# EAGLE board Pi_Block-Panel-v10 (EAGLE 6.6.0), part 1 of 3
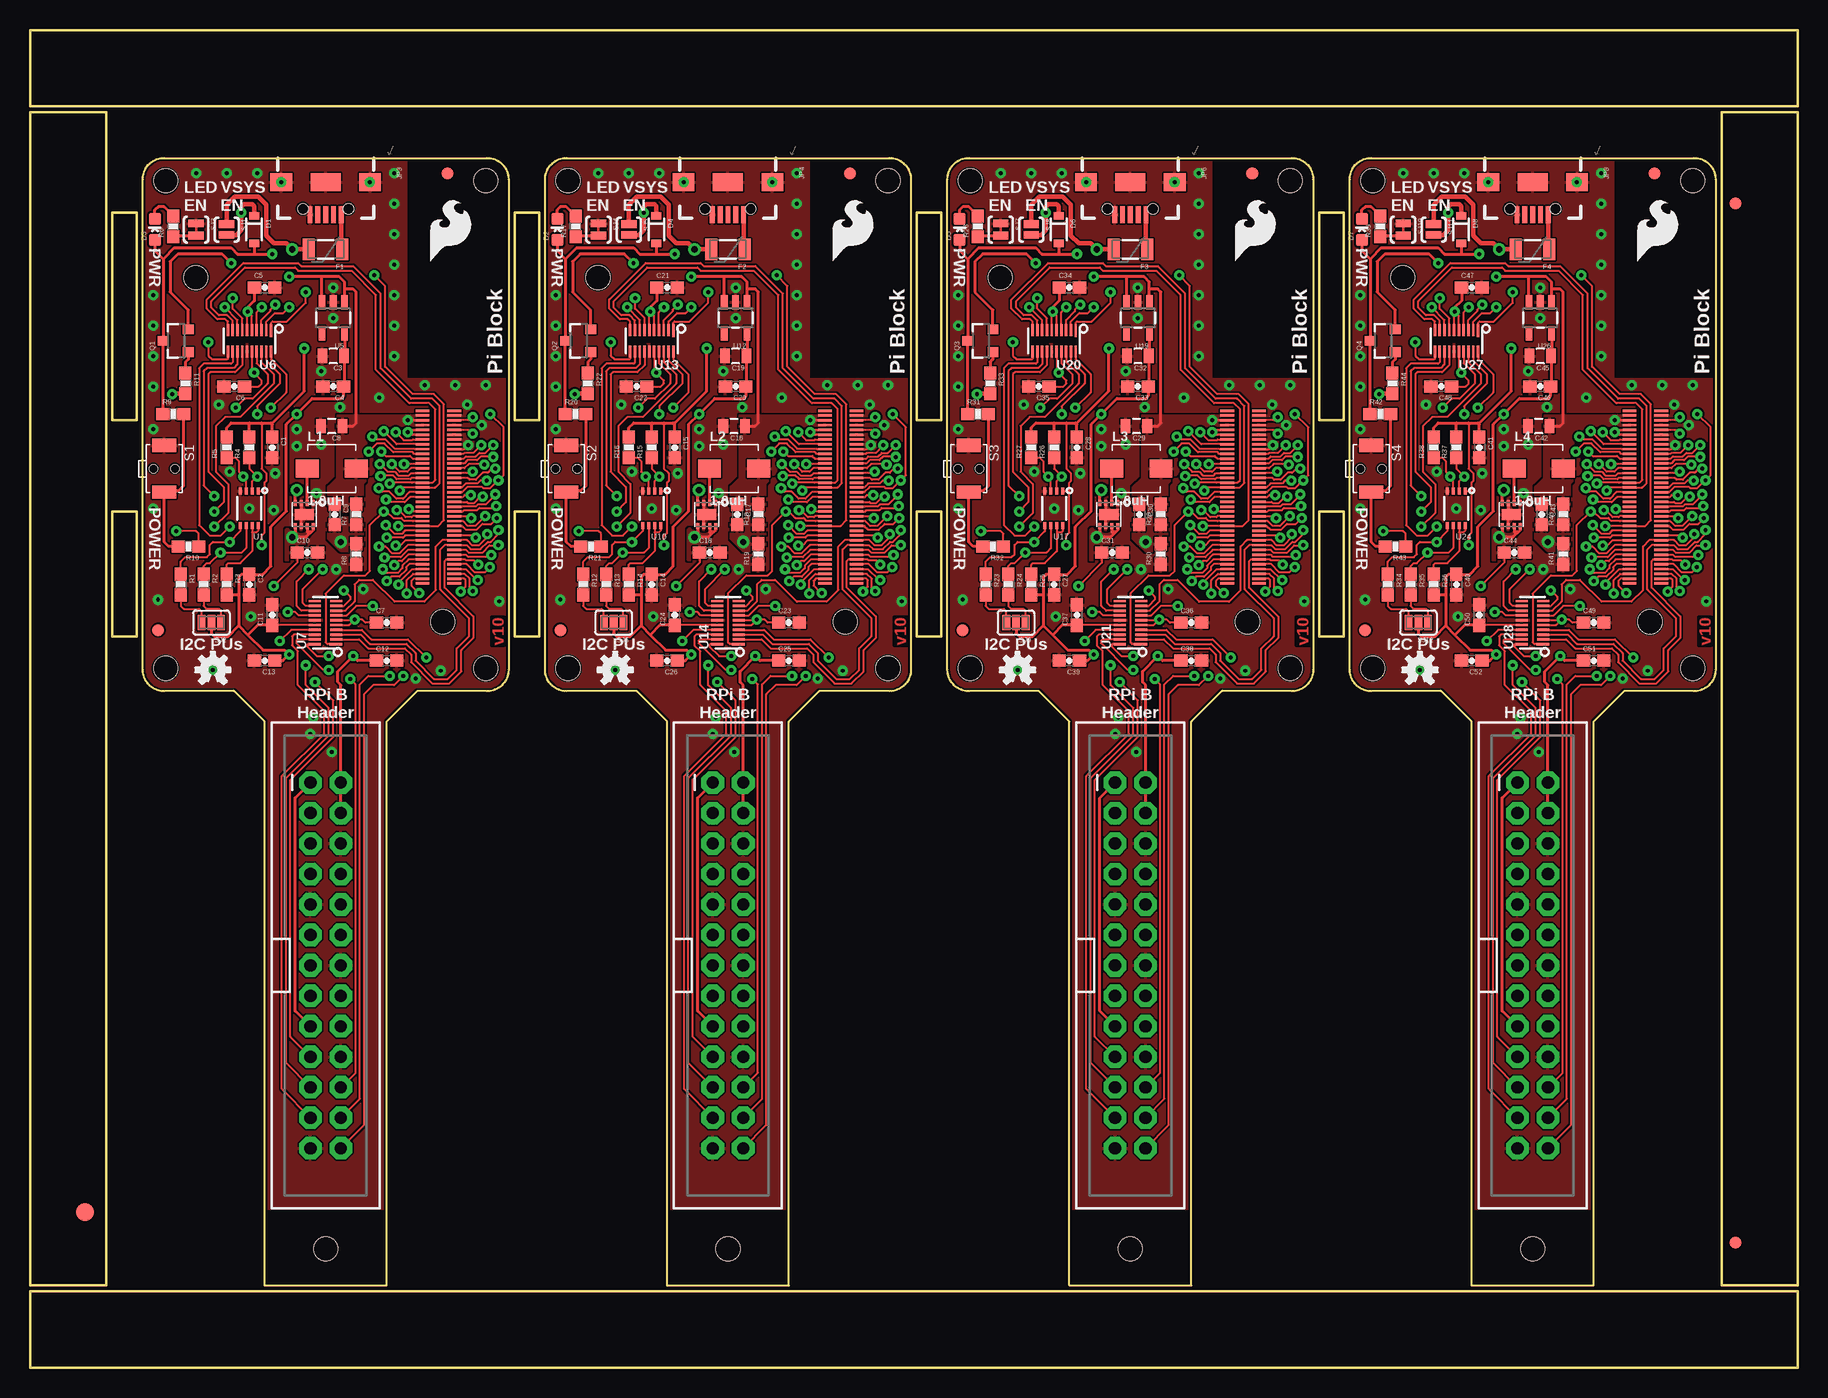
[diagram p0: board, top side]
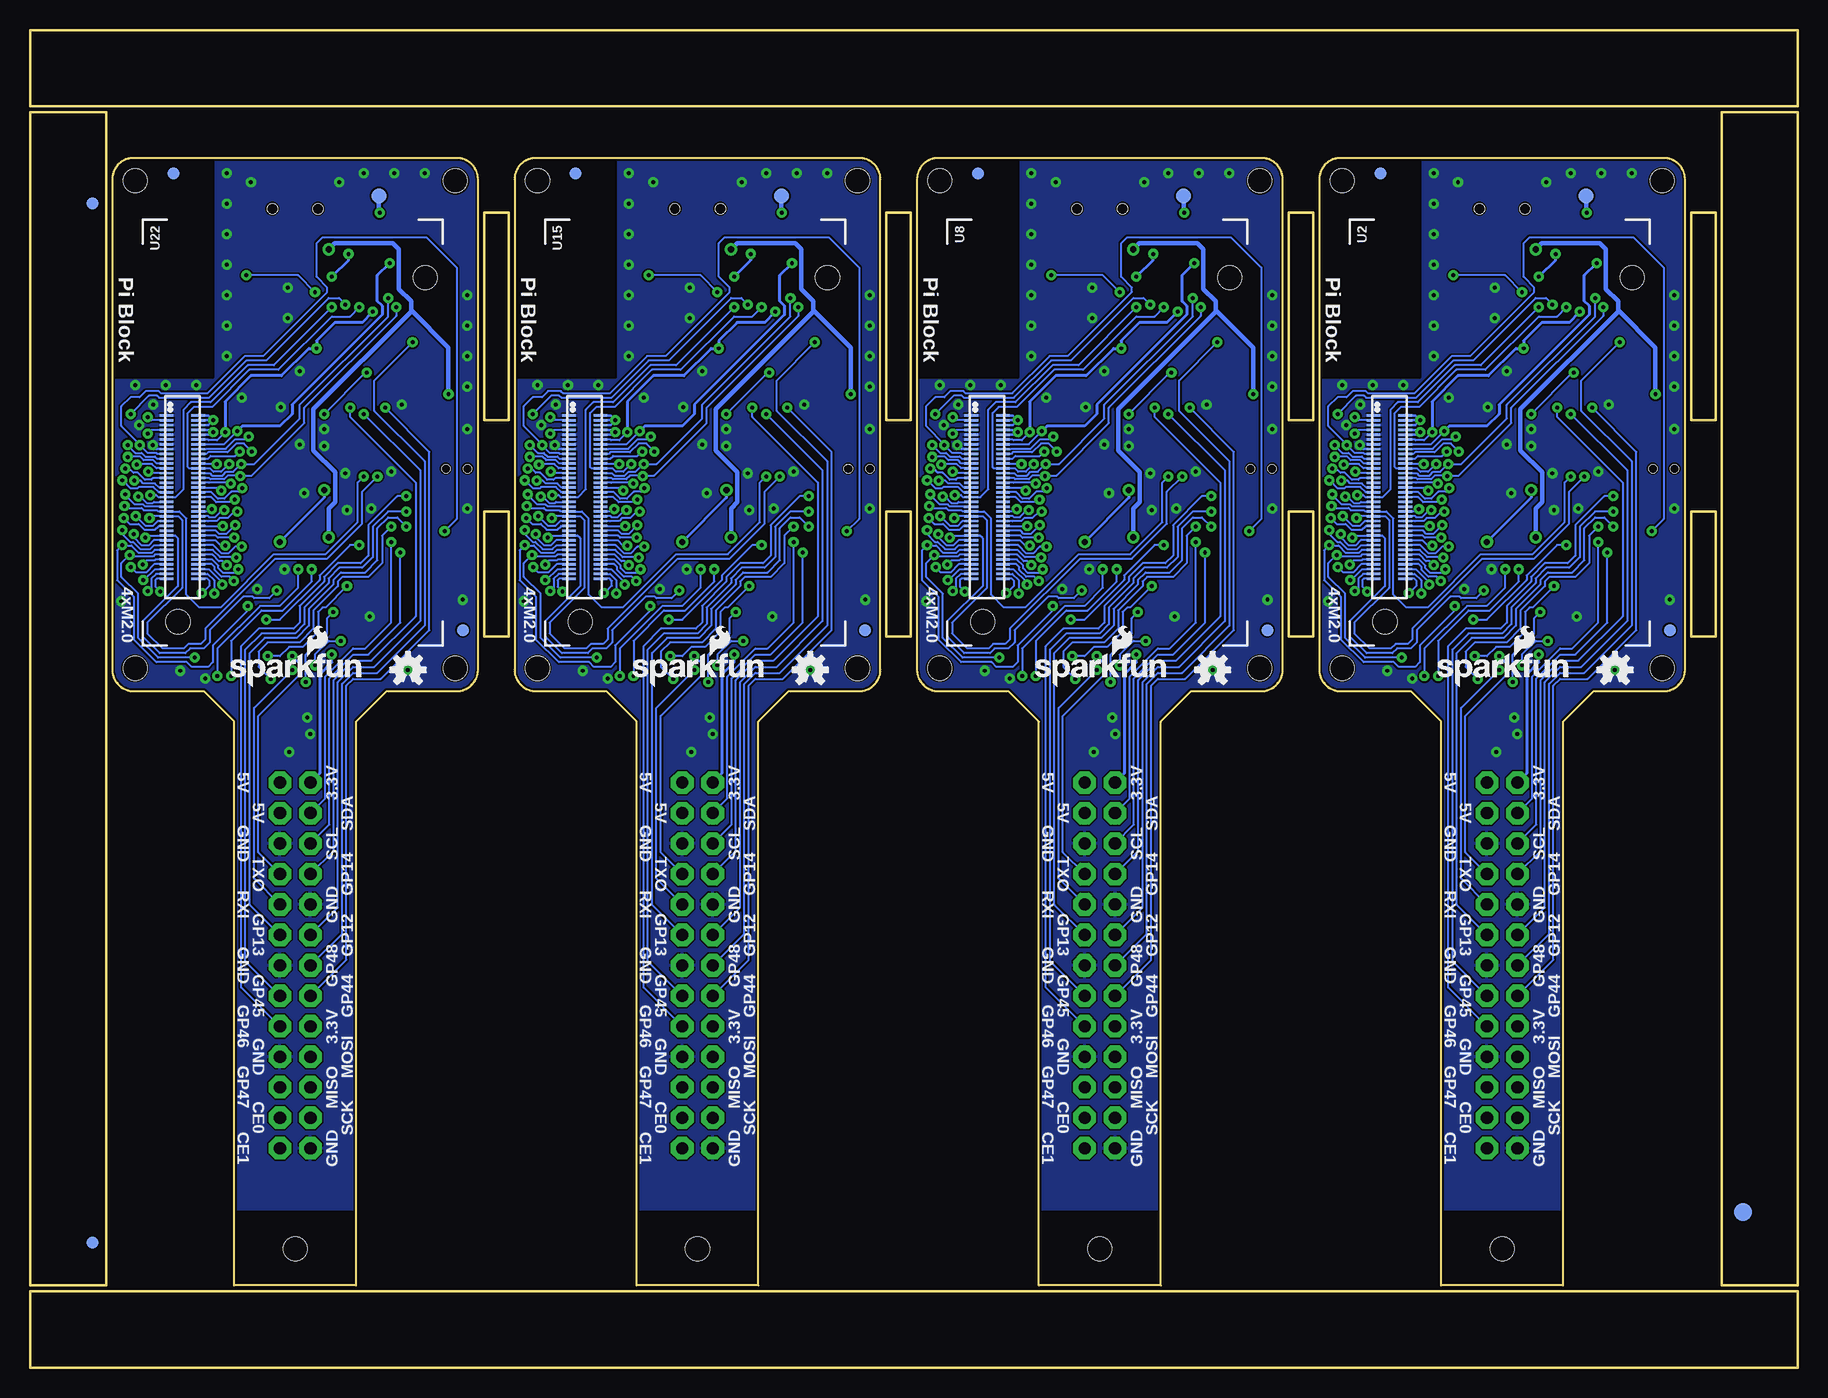
[diagram p1: board, bottom side, seen from below]

Size 147.32 x 111.51 mm. Coordinates in mm from the lower left corner, seen from the top.
Outline: 6.35,82.3 6.35,6.86 0,6.86 0,32.77
Outline: 0,28.45 0,104.65 6.35,104.65 6.35,77.98
Outline: 39.88,99.06 39.88,58.17 arc-90 38.1,56.39 32.26,56.39 29.72,53.85 29.72,6.86 19.56,6.86 19.56,53.85 17.02,56.39 11.18,56.39 arc-90 9.4,58.17 9.4,99.06 arc-90 11.18,100.84 38.1,100.84 arc-90 39.88,99.06
Outline: 73.41,99.06 73.41,58.17 arc-90 71.63,56.39 65.79,56.39 63.25,53.85 63.25,6.86 53.09,6.86 53.09,53.85 50.55,56.39 44.7,56.39 arc-90 42.93,58.17 42.93,99.06 arc-90 44.7,100.84 71.63,100.84 arc-90 73.41,99.06
Outline: 106.93,99.06 106.93,58.17 arc-90 105.16,56.39 99.31,56.39 96.77,53.85 96.77,6.86 86.61,6.86 86.61,53.85 84.07,56.39 78.23,56.39 arc-90 76.45,58.17 76.45,99.06 arc-90 78.23,100.84 105.16,100.84 arc-90 106.93,99.06
Outline: 140.46,99.06 140.46,58.17 arc-90 138.68,56.39 132.84,56.39 130.3,53.85 130.3,6.86 120.14,6.86 120.14,53.85 117.6,56.39 111.76,56.39 arc-90 109.98,58.17 109.98,99.06 arc-90 111.76,100.84 138.68,100.84 arc-90 140.46,99.06
Outline: 0,0 147.32,0 147.32,6.35 0,6.35 0,0
Outline: 140.97,104.65 140.97,6.86 147.32,6.86 147.32,104.65 140.97,104.65
Outline: 147.32,111.51 0,111.51 0,105.16 147.32,105.16 147.32,111.51
Outline: 8.89,96.27 6.86,96.27 6.86,78.99 8.89,78.99 8.89,96.27
Outline: 42.42,96.27 40.39,96.27 40.39,78.99 42.42,78.99 42.42,96.27
Outline: 75.95,96.27 73.91,96.27 73.91,78.99 75.95,78.99 75.95,96.27
Outline: 109.47,96.27 107.44,96.27 107.44,78.99 109.47,78.99 109.47,96.27
Outline: 6.86,60.96 8.89,60.96 8.89,71.37 6.86,71.37 6.86,60.96
Outline: 40.39,60.96 42.42,60.96 42.42,71.37 40.39,71.37 40.39,60.96
Outline: 73.91,60.96 75.95,60.96 75.95,71.37 73.91,71.37 73.91,60.96
Outline: 107.44,60.96 109.47,60.96 109.47,71.37 107.44,71.37 107.44,60.96
Copper layers (1*16): Top 0.035mm / dielectric 1.5mm / Bottom 0.035mm
Design rules "Pi_Block *": minimum track width 6mil, minimum drill 13mil, track to track 6mil, track to pad 6mil, pad to pad 6mil, via to via 6mil, smd to smd 6mil, copper to edge 6mil, drill to drill 6mil, minimum pad ring 12mil, minimum via ring 10mil, stop-mask expansion 4mil, vias tented up to drill 20mil, thermal gap 6mil
Holes 2 mm at 37.97,58.29 11.3,58.29 11.3,98.93 37.97,98.93 24.64,9.91 71.5,58.29 44.83,58.29 44.83,98.93 71.5,98.93 58.17,9.91 105.03,58.29 78.36,58.29 78.36,98.93 105.03,98.93 91.69,9.91 138.56,58.29 111.89,58.29 111.89,98.93 138.56,98.93 125.22,9.91
tRestrict: area 31.5,82.5 to 39.9,100.8; area 65,82.5 to 73.4,100.8; area 98.6,82.5 to 106.9,100.8; area 132.1,82.5 to 140.5,100.8; 52 lines
bRestrict: area 31.5,82.5 to 39.9,100.8; area 65,82.5 to 73.4,100.8; area 98.6,82.5 to 106.9,100.8; area 132.1,82.5 to 140.5,100.8; 12 lines

## Footprints (pad centres in the part's own frame; a part is rotated, then mirrored left to right if it is on the bottom)
0603-CAP = smd 1.1 x 1: 1 -0.85,0; 2 0.85,0
0805 = smd 0.8 x 1.2: 1 -0.9,0; 2 0.9,0
SOD-323 = smd 0.63 x 0.83: A 1.15,0; C -1.15,0
LED-0603 = smd 1 x 1: A 0,-0.877; C 0,0.877
FIDUCIAL-1.5X3 = smd 1.5 x 1.5: 1 0,0
FIDUCIAL-1X2 = smd 1 x 1: 1 0,0
PTC-1206 = smd 1 x 1.8: 1 -1.4,0; 2 1.4,0
2X13-SHROUDED = drill 1.016 pad 1.88 octagon: 1 -1.27,15.24; 2 1.27,15.24; 3 -1.27,12.7; 4 1.27,12.7; 5 -1.27,10.16; 6 1.27,10.16; 7 -1.27,7.62; 8 1.27,7.62; 9 -1.27,5.08; 10 1.27,5.08; 11 -1.27,2.54; 12 1.27,2.54; 13 -1.27,0; 14 1.27,0; 15 -1.27,-2.54; 16 1.27,-2.54; 17 -1.27,-5.08; 18 1.27,-5.08; 19 -1.27,-7.62; 20 1.27,-7.62; 21 -1.27,-10.16; 22 1.27,-10.16; 23 -1.27,-12.7; 24 1.27,-12.7; 25 -1.27,-15.24; 26 1.27,-15.24
USB-B-MICRO-SMD_V03 = smd 1.4 x 0.4: D+1 2.7,0; D-1 2.7,0.65; GND1 2.7,-1.3; ID1 2.7,-0.65; VBUS1 2.7,1.3 | smd 1.5 x 1.8: SHIELD1 0,3.7; SHIELD2 0,-3.7 | smd 1.5 x 2.5: SHIELD3 0,0 | hole 0.85: 2.2,1.9; 2.2,-1.9
INDUCTOR-SRP4020 = smd 1.9 x 1.5: P$1 -2.05,0; P$2 2.05,0
SOT23-3 = smd 0.8 x 0.9: 1 -0.95,-1; 2 0.95,-1; 3 0,1.1
0603-RES = smd 1.1 x 1: 1 -0.85,0; 2 0.85,0
TACTILE_SWITCH-SMD-RIGHT-ANGLE = smd 1.1 x 2: 1 -1.95,0; 2 1.95,0 | hole 0.7: 0,0.9; 0,-0.9
PAD-JUMPER-2-NO_YES_SILK = smd 0.635 x 1.27: 1 -0.45,0; 2 0.45,0
PAD-JUMPER-3-NC_BY_PASTE_YES_SILK_FULL_BOX = smd 0.635 x 1.27: 1 -0.813,0; 2 0,0; 3 0.813,0
PAD-JUMPER-2-NC_BY_TRACE_YES_SILK = smd 0.635 x 1.27: 1 -0.508,0; 2 0.508,0
PAD.03X.05 = smd 1.27 x 1.27: P$1 0,0
PCA9306DC-1:1 = smd 0.25 x 0.602: 1 -0.73,-1.446; 2 -0.23,-1.446; 3 0.27,-1.446; 4 0.77,-1.446; 5 0.77,1.431; 6 0.27,1.431; 7 -0.23,1.431; 8 -0.73,1.431
EDISON_DAUGHTER = smd 1.14 x 0.2: 1 1.98,19.17; 2 4.62,19.17; 3 1.98,18.77; 4 4.62,18.77; 5 1.98,18.37; 6 4.62,18.37; 7 1.98,17.97; 8 4.62,17.97; 9 1.98,17.57; 10 4.62,17.57; 11 1.98,17.17; 12 4.62,17.17; 13 1.98,16.77; 14 4.62,16.77; 15 1.98,16.37; 16 4.62,16.37; 17 1.98,15.97; 18 4.62,15.97; 19 1.98,15.57; 20 4.62,15.57; 21 1.98,15.17; 22 4.62,15.17; 23 1.98,14.77; 24 4.62,14.77; 25 1.98,14.37; 26 4.62,14.37; 27 1.98,13.97; 28 4.62,13.97; 29 1.98,13.57; 30 4.62,13.57; 31 1.98,13.17; 32 4.62,13.17; 33 1.98,12.77; 34 4.62,12.77; 35 1.98,12.37; 36 4.62,12.37; 37 1.98,11.97; 38 4.62,11.97; 39 1.98,11.57; 40 4.62,11.57; 41 1.98,11.17; 42 4.62,11.17; 43 1.98,10.77; 44 4.62,10.77; 45 1.98,10.37; 46 4.62,10.37; 47 1.98,9.97; 48 4.62,9.97; 49 1.98,9.57; 50 4.62,9.57; 51 1.98,9.17; 52 4.62,9.17; 53 1.98,8.77; 54 4.62,8.77; 55 1.98,8.37; 56 4.62,8.37; 57 1.98,7.97; 58 4.62,7.97; 59 1.98,7.57; 60 4.62,7.57; 61 1.98,7.17; 62 4.62,7.17; 63 1.98,6.77; 64 4.62,6.77; 65 1.98,6.37; 66 4.62,6.37; 67 1.98,5.97; 68 4.62,5.97; 69 1.98,5.57; 70 4.62,5.57 | hole 2: 23.53,30.67; 2.93,1.98
DF40C-70DP-0.4(51) = smd 0.2 x 1.14 bottom: 1 6.8,1.32; 2 6.8,-1.32; 3 6.4,1.32; 4 6.4,-1.32; 5 6,1.32; 6 6,-1.32; 7 5.6,1.32; 8 5.6,-1.32; 9 5.2,1.32; 10 5.2,-1.32; 11 4.8,1.32; 12 4.8,-1.32; 13 4.4,1.32; 14 4.4,-1.32; 15 4,1.32; 16 4,-1.32; 17 3.6,1.32; 18 3.6,-1.32; 19 3.2,1.32; 20 3.2,-1.32; 21 2.8,1.32; 22 2.8,-1.32; 23 2.4,1.32; 24 2.4,-1.32; 25 2,1.32; 26 2,-1.32; 27 1.6,1.32; 28 1.6,-1.32; 29 1.2,1.32; 30 1.2,-1.32; 31 0.8,1.32; 32 0.8,-1.32; 33 0.4,1.32; 34 0.4,-1.32; 35 0,1.32; 36 0,-1.32; 37 -0.4,1.32; 38 -0.4,-1.32; 39 -0.8,1.32; 40 -0.8,-1.32; 41 -1.2,1.32; 42 -1.2,-1.32; 43 -1.6,1.32; 44 -1.6,-1.32; 45 -2,1.32; 46 -2,-1.32; 47 -2.4,1.32; 48 -2.4,-1.32; 49 -2.8,1.32; 50 -2.8,-1.32; 51 -3.2,1.32; 52 -3.2,-1.32; 53 -3.6,1.32; 54 -3.6,-1.32; 55 -4,1.32; 56 -4,-1.32; 57 -4.4,1.32; 58 -4.4,-1.32; 59 -4.8,1.32; 60 -4.8,-1.32; 61 -5.2,1.32; 62 -5.2,-1.32; 63 -5.6,1.32; 64 -5.6,-1.32; 65 -6,1.32; 66 -6,-1.32; 67 -6.4,1.32; 68 -6.4,-1.32; 69 -6.8,1.32; 70 -6.8,-1.32; NC1 7.2,1.32; NC2 7.2,-1.32; NC3 -7.2,-1.32; NC4 -7.2,1.32
WSON-8-PAD = smd 0.25 x 0.5: 1 -0.75,-0.95; 2 -0.25,-0.95; 3 0.25,-0.95; 4 0.75,-0.95; 5 0.75,0.95; 6 0.25,0.95; 7 -0.25,0.95; 8 -0.75,0.95 | smd 1.6 x 0.9: PAD 0,0
SOT23-5 = smd 0.55 x 1.2: 1 -0.95,-1.3; 2 0,-1.3; 3 0.95,-1.3; 4 0.95,1.3; 5 -0.95,1.3
UFDFN-20 = smd 0.2 x 1.1: 1 -1.8,-0.85 | smd 0.2 x 1: 2 -1.4,-0.9; 3 -1,-0.9; 4 -0.6,-0.9; 5 -0.2,-0.9; 6 0.2,-0.9; 7 0.6,-0.9; 8 1,-0.9; 9 1.4,-0.9; 10 1.8,-0.9; 11 1.8,0.9; 12 1.4,0.9; 13 1,0.9; 14 0.6,0.9; 15 0.2,0.9; 16 -0.2,0.9; 17 -0.6,0.9; 18 -1,0.9; 19 -1.4,0.9; 20 -1.8,0.9

## Placement (x,y rotation side)
C1  0.1uF  [0603-CAP]  20.19,76.71 270 top
C2  0.1uF  [0603-CAP]  18.29,65.28 270 top
C3  10uF  [0805]  25.27,84.33 180 top
C4  0.1uF  [0603-CAP]  25.27,81.79 180 top
C5  0.1uF  [0603-CAP]  19.56,90.04 0 top
C6  0.1uF  [0603-CAP]  17.02,81.79 180 top
C7  0.1uF  [0603-CAP]  29.72,62.1 0 top
C8  22uF  [0805]  25.15,78.49 180 top
C9  9.0pF  [0603-CAP]  25.4,71.12 270 top
C10  4.7uF  [0603-CAP]  23.11,67.94 0 top
C11  0.1uF  [0603-CAP]  20.19,62.74 90 top
C12  1.0uF  [0603-CAP]  29.72,58.93 0 top
C13  1.0uF  [0603-CAP]  19.56,58.93 180 top
C14  0.1uF  [0603-CAP]  51.82,65.28 270 top
C15  0.1uF  [0603-CAP]  53.72,76.71 270 top
C16  22uF  [0805]  58.67,78.49 180 top
C17  9.0pF  [0603-CAP]  58.93,71.12 270 top
C18  4.7uF  [0603-CAP]  56.64,67.94 0 top
C19  10uF  [0805]  58.8,84.33 180 top
C20  0.1uF  [0603-CAP]  58.8,81.79 180 top
C21  0.1uF  [0603-CAP]  53.09,90.04 0 top
C22  0.1uF  [0603-CAP]  50.55,81.79 180 top
C23  0.1uF  [0603-CAP]  63.25,62.1 0 top
C24  0.1uF  [0603-CAP]  53.72,62.74 90 top
C25  1.0uF  [0603-CAP]  63.25,58.93 0 top
C26  1.0uF  [0603-CAP]  53.09,58.93 180 top
C27  0.1uF  [0603-CAP]  85.34,65.28 270 top
C28  0.1uF  [0603-CAP]  87.25,76.71 270 top
C29  22uF  [0805]  92.2,78.49 180 top
C30  9.0pF  [0603-CAP]  92.46,71.12 270 top
C31  4.7uF  [0603-CAP]  90.17,67.94 0 top
C32  10uF  [0805]  92.33,84.33 180 top
C33  0.1uF  [0603-CAP]  92.33,81.79 180 top
C34  0.1uF  [0603-CAP]  86.61,90.04 0 top
C35  0.1uF  [0603-CAP]  84.07,81.79 180 top
C36  0.1uF  [0603-CAP]  96.77,62.1 0 top
C37  0.1uF  [0603-CAP]  87.25,62.74 90 top
C38  1.0uF  [0603-CAP]  96.77,58.93 0 top
C39  1.0uF  [0603-CAP]  86.61,58.93 180 top
C40  0.1uF  [0603-CAP]  118.87,65.28 270 top
C41  0.1uF  [0603-CAP]  120.78,76.71 270 top
C42  22uF  [0805]  125.73,78.49 180 top
C43  9.0pF  [0603-CAP]  125.98,71.12 270 top
C44  4.7uF  [0603-CAP]  123.7,67.94 0 top
C45  10uF  [0805]  125.86,84.33 180 top
C46  0.1uF  [0603-CAP]  125.86,81.79 180 top
C47  0.1uF  [0603-CAP]  120.14,90.04 0 top
C48  0.1uF  [0603-CAP]  117.6,81.79 180 top
C49  0.1uF  [0603-CAP]  130.3,62.1 0 top
C50  0.1uF  [0603-CAP]  120.78,62.74 90 top
C51  1.0uF  [0603-CAP]  130.3,58.93 0 top
C52  1.0uF  [0603-CAP]  120.14,58.93 180 top
D1  BAT20J  [SOD-323]  18.67,94.87 270 top
D2  BLUE  [LED-0603]  43.94,94.87 0 top
D3  BLUE  [LED-0603]  10.41,94.87 0 top
D4  BAT20J  [SOD-323]  52.2,94.87 270 top
D5  BLUE  [LED-0603]  77.47,94.87 0 top
D6  BAT20J  [SOD-323]  85.72,94.87 270 top
D7  BLUE  [LED-0603]  111,94.87 0 top
D8  BAT20J  [SOD-323]  119.25,94.87 270 top
E$1  [FIDUCIAL-1.5X3]  4.57,12.95 0 top
E$2  [FIDUCIAL-1.5X3]  4.57,12.95 0 bottom
E$3  [FIDUCIAL-1X2]  142.11,10.41 0 bottom
E$4  [FIDUCIAL-1X2]  142.11,97.03 180 top
E$5  [FIDUCIAL-1X2]  142.11,10.41 0 top
E$6  [FIDUCIAL-1X2]  142.11,97.03 180 bottom
F1  PTCSMD  [PTC-1206]  24.64,93.22 180 top
F2  PTCSMD  [PTC-1206]  58.17,93.22 180 top
F3  PTCSMD  [PTC-1206]  91.69,93.22 180 top
F4  PTCSMD  [PTC-1206]  125.22,93.22 180 top
FID1  FIDUCIAL1X2  [FIDUCIAL-1X2]  10.67,61.47 0 top
FID2  FIDUCIAL1X2  [FIDUCIAL-1X2]  34.8,99.57 0 top
FID3  FIDUCIAL1X2  [FIDUCIAL-1X2]  10.67,61.47 0 bottom
FID4  FIDUCIAL1X2  [FIDUCIAL-1X2]  34.8,99.57 0 bottom
FID5  FIDUCIAL1X2  [FIDUCIAL-1X2]  44.2,61.47 0 top
FID6  FIDUCIAL1X2  [FIDUCIAL-1X2]  68.33,99.57 0 top
FID7  FIDUCIAL1X2  [FIDUCIAL-1X2]  44.2,61.47 0 bottom
FID8  FIDUCIAL1X2  [FIDUCIAL-1X2]  68.33,99.57 0 bottom
FID9  FIDUCIAL1X2  [FIDUCIAL-1X2]  77.72,61.47 0 top
FID10  FIDUCIAL1X2  [FIDUCIAL-1X2]  101.85,99.57 0 top
FID11  FIDUCIAL1X2  [FIDUCIAL-1X2]  77.72,61.47 0 bottom
FID12  FIDUCIAL1X2  [FIDUCIAL-1X2]  101.85,99.57 0 bottom
FID13  FIDUCIAL1X2  [FIDUCIAL-1X2]  111.25,61.47 0 top
FID14  FIDUCIAL1X2  [FIDUCIAL-1X2]  135.38,99.57 0 top
FID15  FIDUCIAL1X2  [FIDUCIAL-1X2]  111.25,61.47 0 bottom
FID16  FIDUCIAL1X2  [FIDUCIAL-1X2]  135.38,99.57 0 bottom
JP1  RASPBERRYPI-GPIOPTH  [2X13-SHROUDED]  24.64,33.53 0 top
JP2  RASPBERRYPI-GPIOPTH  [2X13-SHROUDED]  58.17,33.53 0 top
JP3  USB_MICROB  [USB-B-MICRO-SMD_V03]  24.64,98.81 270 top
JP4  USB_MICROB  [USB-B-MICRO-SMD_V03]  58.17,98.81 270 top
JP5  RASPBERRYPI-GPIOPTH  [2X13-SHROUDED]  91.69,33.53 0 top
JP6  USB_MICROB  [USB-B-MICRO-SMD_V03]  91.69,98.81 270 top
JP7  RASPBERRYPI-GPIOPTH  [2X13-SHROUDED]  125.22,33.53 0 top
JP8  USB_MICROB  [USB-B-MICRO-SMD_V03]  125.22,98.81 270 top
L1  1.0uH  [INDUCTOR-SRP4020]  25.15,74.93 0 top
L2  1.0uH  [INDUCTOR-SRP4020]  58.67,74.93 0 top
L3  1.0uH  [INDUCTOR-SRP4020]  92.2,74.93 0 top
L4  1.0uH  [INDUCTOR-SRP4020]  125.73,74.93 0 top
LOGO1  OSHW-LOGOS  [OSHW-LOGO-S]  15.24,58.17 0 top
LOGO2  OSHW-LOGOS  [OSHW-LOGO-S]  15.24,58.17 0 bottom
LOGO3  SFE_LOGO_FLAME.2_INCH  [SFE_LOGO_FLAME_.2]  33.02,91.95 0 top
LOGO4  SFE_LOGO_NAME_FLAME.1_INCH  [SFE_LOGO_NAME_FLAME_.1]  30.48,56.64 0 bottom
LOGO5  OSHW-LOGOS  [OSHW-LOGO-S]  48.77,58.17 0 bottom
LOGO6  OSHW-LOGOS  [OSHW-LOGO-S]  48.77,58.17 0 top
LOGO7  SFE_LOGO_NAME_FLAME.1_INCH  [SFE_LOGO_NAME_FLAME_.1]  64.01,56.64 0 bottom
LOGO8  SFE_LOGO_FLAME.2_INCH  [SFE_LOGO_FLAME_.2]  66.55,91.95 0 top
LOGO9  OSHW-LOGOS  [OSHW-LOGO-S]  82.3,58.17 0 bottom
LOGO10  OSHW-LOGOS  [OSHW-LOGO-S]  82.3,58.17 0 top
LOGO11  SFE_LOGO_NAME_FLAME.1_INCH  [SFE_LOGO_NAME_FLAME_.1]  97.54,56.64 0 bottom
LOGO12  SFE_LOGO_FLAME.2_INCH  [SFE_LOGO_FLAME_.2]  100.08,91.95 0 top
LOGO13  OSHW-LOGOS  [OSHW-LOGO-S]  115.82,58.17 0 bottom
LOGO14  OSHW-LOGOS  [OSHW-LOGO-S]  115.82,58.17 0 top
LOGO15  SFE_LOGO_NAME_FLAME.1_INCH  [SFE_LOGO_NAME_FLAME_.1]  131.06,56.64 0 bottom
LOGO16  SFE_LOGO_FLAME.2_INCH  [SFE_LOGO_FLAME_.2]  133.6,91.95 0 top
Q1  200mA/50V  [SOT23-3]  12.19,85.6 90 top
Q2  200mA/50V  [SOT23-3]  45.72,85.6 90 top
Q3  200mA/50V  [SOT23-3]  79.25,85.6 90 top
Q4  200mA/50V  [SOT23-3]  112.78,85.6 90 top
R1  10K  [0603-RES]  12.57,65.28 270 top
R2  10K  [0603-RES]  14.48,65.28 270 top
R3  200k  [0603-RES]  16.38,65.28 270 top
R4  DNP  [0603-RES]  18.29,76.71 90 top
R5  DNP  [0603-RES]  16.38,76.71 90 top
R6  1K  [0603-RES]  11.94,95.12 90 top
R7  680k  [0603-RES]  27.18,71.12 90 top
R8  120k  [0603-RES]  27.18,67.82 90 top
R9  10K  [0603-RES]  11.94,79.5 0 top
R10  220  [0603-RES]  13.21,68.45 180 top
R11  1K  [0603-RES]  12.95,82.04 270 top
R12  10K  [0603-RES]  46.1,65.28 270 top
R13  10K  [0603-RES]  48.01,65.28 270 top
R14  200k  [0603-RES]  49.91,65.28 270 top
R15  DNP  [0603-RES]  51.82,76.71 90 top
R16  DNP  [0603-RES]  49.91,76.71 90 top
R17  1K  [0603-RES]  45.47,95.12 90 top
R18  680k  [0603-RES]  60.71,71.12 90 top
R19  120k  [0603-RES]  60.71,67.82 90 top
R20  10K  [0603-RES]  45.47,79.5 0 top
R21  220  [0603-RES]  46.74,68.45 180 top
R22  1K  [0603-RES]  46.48,82.04 270 top
R23  10K  [0603-RES]  79.63,65.28 270 top
R24  10K  [0603-RES]  81.53,65.28 270 top
R25  200k  [0603-RES]  83.44,65.28 270 top
R26  DNP  [0603-RES]  85.34,76.71 90 top
R27  DNP  [0603-RES]  83.44,76.71 90 top
R28  1K  [0603-RES]  78.99,95.12 90 top
R29  680k  [0603-RES]  94.23,71.12 90 top
R30  120k  [0603-RES]  94.23,67.82 90 top
R31  10K  [0603-RES]  78.99,79.5 0 top
R32  220  [0603-RES]  80.26,68.45 180 top
R33  1K  [0603-RES]  80.01,82.04 270 top
R34  10K  [0603-RES]  113.16,65.28 270 top
R35  10K  [0603-RES]  115.06,65.28 270 top
R36  200k  [0603-RES]  116.97,65.28 270 top
R37  DNP  [0603-RES]  118.87,76.71 90 top
R38  DNP  [0603-RES]  116.97,76.71 90 top
R39  1K  [0603-RES]  112.52,95.12 90 top
R40  680k  [0603-RES]  127.76,71.12 90 top
R41  120k  [0603-RES]  127.76,67.82 90 top
R42  10K  [0603-RES]  112.52,79.5 0 top
R43  220  [0603-RES]  113.79,68.45 180 top
R44  1K  [0603-RES]  113.54,82.04 270 top
S1  POWER  [TACTILE_SWITCH-SMD-RIGHT-ANGLE]  11.18,74.93 270 top
S2  POWER  [TACTILE_SWITCH-SMD-RIGHT-ANGLE]  44.7,74.93 270 top
S3  POWER  [TACTILE_SWITCH-SMD-RIGHT-ANGLE]  78.23,74.93 270 top
S4  POWER  [TACTILE_SWITCH-SMD-RIGHT-ANGLE]  111.76,74.93 270 top
SJ1  JUMPER-PAD-2-NOYES_SILK  [PAD-JUMPER-2-NO_YES_SILK]  16.38,94.87 270 top
SJ2  JUMPER-PAD-3-NC_BY_PASTE  [PAD-JUMPER-3-NC_BY_PASTE_YES_SILK_FULL_BOX]  15.11,62.1 180 top
SJ3  JUMPER-PAD-2-NC_BY_TRACE  [PAD-JUMPER-2-NC_BY_TRACE_YES_SILK]  13.84,94.87 270 top
SJ4  JUMPER-PAD-2-NC_BY_TRACE  [PAD-JUMPER-2-NC_BY_TRACE_YES_SILK]  47.37,94.87 270 top
SJ5  JUMPER-PAD-2-NOYES_SILK  [PAD-JUMPER-2-NO_YES_SILK]  49.91,94.87 270 top
SJ6  JUMPER-PAD-3-NC_BY_PASTE  [PAD-JUMPER-3-NC_BY_PASTE_YES_SILK_FULL_BOX]  48.64,62.1 180 top
SJ7  JUMPER-PAD-2-NC_BY_TRACE  [PAD-JUMPER-2-NC_BY_TRACE_YES_SILK]  80.9,94.87 270 top
SJ8  JUMPER-PAD-2-NOYES_SILK  [PAD-JUMPER-2-NO_YES_SILK]  83.44,94.87 270 top
SJ9  JUMPER-PAD-3-NC_BY_PASTE  [PAD-JUMPER-3-NC_BY_PASTE_YES_SILK_FULL_BOX]  82.17,62.1 180 top
SJ10  JUMPER-PAD-2-NC_BY_TRACE  [PAD-JUMPER-2-NC_BY_TRACE_YES_SILK]  114.43,94.87 270 top
SJ11  JUMPER-PAD-2-NOYES_SILK  [PAD-JUMPER-2-NO_YES_SILK]  116.97,94.87 270 top
SJ12  JUMPER-PAD-3-NC_BY_PASTE  [PAD-JUMPER-3-NC_BY_PASTE_YES_SILK_FULL_BOX]  115.7,62.1 180 top
TP1  TEST-POINT3X5  [PAD.03X.05]  17.65,97.66 0 bottom
TP2  TEST-POINT3X5  [PAD.03X.05]  51.18,97.66 0 bottom
TP3  TEST-POINT3X5  [PAD.03X.05]  84.71,97.66 0 bottom
TP4  TEST-POINT3X5  [PAD.03X.05]  118.24,97.66 0 bottom
U1  PCA9306  [PCA9306DC-1:1]  18.29,71.63 180 top
U2  EDISON_CONNECTOR_FULLMOUNTING_HOLES  [EDISON_DAUGHTER]  37.34,60.2 0 bottom
U3  EDISON_CONNECTOR_FULLHEADER  [DF40C-70DP-0.4(51)]  34.04,72.57 90 bottom
U4  TPS62065  [WSON-8-PAD]  22.86,71.12 180 top
U5  MIC5219 3.3V  [SOT23-5]  25.27,87.5 180 top
U6  TXB0108  [UFDFN-20]  18.29,85.6 180 top
U7  TXB0108  [UFDFN-20]  24.64,62.1 90 top
U8  EDISON_CONNECTOR_FULLMOUNTING_HOLES  [EDISON_DAUGHTER]  70.87,60.2 0 bottom
U9  EDISON_CONNECTOR_FULLHEADER  [DF40C-70DP-0.4(51)]  67.57,72.57 90 bottom
U10  PCA9306  [PCA9306DC-1:1]  51.82,71.63 180 top
U11  TPS62065  [WSON-8-PAD]  56.39,71.12 180 top
U12  MIC5219 3.3V  [SOT23-5]  58.8,87.5 180 top
U13  TXB0108  [UFDFN-20]  51.82,85.6 180 top
U14  TXB0108  [UFDFN-20]  58.17,62.1 90 top
U15  EDISON_CONNECTOR_FULLMOUNTING_HOLES  [EDISON_DAUGHTER]  104.39,60.2 0 bottom
U16  EDISON_CONNECTOR_FULLHEADER  [DF40C-70DP-0.4(51)]  101.09,72.57 90 bottom
U17  PCA9306  [PCA9306DC-1:1]  85.34,71.63 180 top
U18  TPS62065  [WSON-8-PAD]  89.92,71.12 180 top
U19  MIC5219 3.3V  [SOT23-5]  92.33,87.5 180 top
U20  TXB0108  [UFDFN-20]  85.34,85.6 180 top
U21  TXB0108  [UFDFN-20]  91.69,62.1 90 top
U22  EDISON_CONNECTOR_FULLMOUNTING_HOLES  [EDISON_DAUGHTER]  137.92,60.2 0 bottom
U23  EDISON_CONNECTOR_FULLHEADER  [DF40C-70DP-0.4(51)]  134.62,72.57 90 bottom
U24  PCA9306  [PCA9306DC-1:1]  118.87,71.63 180 top
U25  TPS62065  [WSON-8-PAD]  123.44,71.12 180 top
U26  MIC5219 3.3V  [SOT23-5]  125.86,87.5 180 top
U27  TXB0108  [UFDFN-20]  118.87,85.6 180 top
U28  TXB0108  [UFDFN-20]  125.22,62.1 90 top

## Library data of the parts
C1 C2 C4-C7 C11 C14 C15 C20-C24 C27 C28 C33-C37 C40 C41 C46-C50 = SparkFun-Capacitors; PROD_ID: CAP-00810
C3 C19 C32 C45 = SparkFun-Capacitors; PROD_ID: CAP-11330
C8 C16 C29 C42 = SparkFun-Capacitors; PROD_ID: CAP-08402
C9 C17 C30 C43 = SparkFun-Capacitors; PROD_ID: CAP-09341
C10 C18 C31 C44 = SparkFun-Capacitors; PROD_ID: CAP-08280
C12 C13 C25 C26 C38 C39 C51 C52 = SparkFun-Capacitors; PROD_ID: CAP-00868
D1 D4 D6 D8 = SparkFun-DiscreteSemi; PROD_ID: DIO-11623
D2 D3 D5 D7 = SparkFun-LED; PROD_ID: DIO-08575
E$1 E$2 = SparkFun-Retired
E$3-E$6 FID1-FID16 LOGO1-LOGO16 = SparkFun-Aesthetics
F1-F4 = SparkFun-PowerIC; PROD_ID: RES-11150
JP1 JP2 JP5 JP7 = SparkFun-Boards; DIST: sparkfun; DIST_ID: PRT-11490
JP3 JP4 JP6 JP8 = SparkFun-Connectors; PROD_ID: CONN-11752
L1-L4 = SparkFun-Passives; PROD_ID: NDUC-12274
Q1-Q4 = SparkFun-DiscreteSemi; PROD_ID: TRANS-00830
R1 R2 R9 R12 R13 R20 R23 R24 R31 R34 R35 R42 = SparkFun-Resistors; PROD_ID: RES-00824
R3 R14 R25 R36 = SparkFun-Resistors; PROD_ID: RES-09385
R4 R5 R15 R16 R26 R27 R37 R38 = SparkFun-Resistors
R6 R11 R17 R22 R28 R33 R39 R44 = SparkFun-Resistors; PROD_ID: RES-07856
R7 R18 R29 R40 = SparkFun-Resistors; PROD_ID: RES-12280
R8 R19 R30 R41 = SparkFun-Resistors; PROD_ID: RES-12279
R10 R21 R32 R43 = SparkFun-Resistors; PROD_ID: RES-07861
S1-S4 = SparkFun-Electromechanical; PROD_ID: COMP-12265
SJ1-SJ12 TP1-TP4 = SparkFun-Passives
U1 U10 U17 U24 = SparkFun-DigitalIC; PROD_ID: IC-10023
U2 U3 U8 U9 U15 U16 U22 U23 = Edison
U4 U11 U18 U25 = SparkFun-PowerIC; PROD_ID: IC-12273
U5 U12 U19 U26 = SparkFun-PowerIC; PROD_ID: VREG-09872
U6 U7 U13 U14 U20 U21 U27 U28 = SparkFun-DigitalIC; PROD_ID: IC-12292

## Nets
1.8V: C1.1 C5.1 C7.1 R4.2 R5.2 U1.1 U2.12 U3.12 U6.5 U6.6 U7.5 U7.6
1.8V1: C15.1 C21.1 C23.1 R15.2 R16.2 U8.12 U9.12 U10.1 U13.5 U13.6 U14.5 U14.6
1.8V2: C28.1 C34.1 C36.1 R26.2 R27.2 U15.12 U16.12 U17.1 U20.5 U20.6 U21.5 U21.6
1.8V3: C41.1 C47.1 C49.1 R37.2 R38.2 U22.12 U23.12 U24.1 U27.5 U27.6 U28.5 U28.6
3.3V: U2.8 U2.10 U3.8 U3.10
3.3V1: U8.8 U8.10 U9.8 U9.10
3.3V2: U15.8 U15.10 U16.8 U16.10
3.3V3: U22.8 U22.10 U23.8 U23.10
3.3V_LOCAL: C2.1 C3.1 C4.1 C6.1 C11.1 C13.1 JP1.1 JP1.17 R3.2 SJ2.2 U5.5 U6.16 U7.16
3.3V_LOCAL1: C14.1 C19.1 C20.1 C22.1 C24.1 C26.1 JP2.1 JP2.17 R14.2 SJ6.2 U12.5 U13.16 U14.16
3.3V_LOCAL2: C27.1 C32.1 C33.1 C35.1 C37.1 C39.1 JP5.1 JP5.17 R25.2 SJ9.2 U19.5 U20.16 U21.16
3.3V_LOCAL3: C40.1 C45.1 C46.1 C48.1 C50.1 C52.1 JP7.1 JP7.17 R36.2 SJ12.2 U26.5 U27.16 U28.16
5V: C10.1 C12.1 F1.2 JP1.2 JP1.4 R11.2 SJ1.1 U4.5 U4.7 U4.8
5V1: C18.1 C25.1 F2.2 JP2.2 JP2.4 R22.2 SJ5.1 U11.5 U11.7 U11.8
5V2: C31.1 C38.1 F3.2 JP5.2 JP5.4 R33.2 SJ8.1 U18.5 U18.7 U18.8
5V3: C44.1 C51.1 F4.2 JP7.2 JP7.4 R44.2 SJ11.1 U25.5 U25.7 U25.8
DCIN: Q1.2 U2.14 U3.14
DCIN1: Q2.2 U8.14 U9.14
DCIN2: Q3.2 U15.14 U16.14
DCIN3: Q4.2 U22.14 U23.14
FAULT: U2.19 U3.19
FAULT1: U8.19 U9.19
FAULT2: U15.19 U16.19
FAULT3: U22.19 U23.19
FW_RCVR: U2.69 U3.69
FW_RCVR1: U8.69 U9.69
FW_RCVR2: U15.69 U16.69
FW_RCVR3: U22.69 U23.69
GND: C1.2 C2.2 C3.2 C4.2 C5.2 C6.2 C7.2 C8.2 C10.2 C11.2 C12.2 C13.2 JP1.6 JP1.9 JP1.14 JP1.20 JP1.25 JP3.GND1 JP3.SHIELD1 JP3.SHIELD2 JP3.SHIELD3 R8.1 S1.1 SJ3.1 U1.4 U2.1 U2.5 U2.9 U2.11 U2.13 U2.15 U3.1 U3.5 U3.9 U3.11 U3.13 U3.15 U4.1 U4.3 U4.6 U4.PAD U5.2 U6.15 U7.15
GND1: C14.2 C15.2 C16.2 C18.2 C19.2 C20.2 C21.2 C22.2 C23.2 C24.2 C25.2 C26.2 JP2.6 JP2.9 JP2.14 JP2.20 JP2.25 JP4.GND1 JP4.SHIELD1 JP4.SHIELD2 JP4.SHIELD3 R19.1 S2.1 SJ4.1 U8.1 U8.5 U8.9 U8.11 U8.13 U8.15 U9.1 U9.5 U9.9 U9.11 U9.13 U9.15 U10.4 U11.1 U11.3 U11.6 U11.PAD U12.2 U13.15 U14.15
GND2: C27.2 C28.2 C29.2 C31.2 C32.2 C33.2 C34.2 C35.2 C36.2 C37.2 C38.2 C39.2 JP5.6 JP5.9 JP5.14 JP5.20 JP5.25 JP6.GND1 JP6.SHIELD1 JP6.SHIELD2 JP6.SHIELD3 R30.1 S3.1 SJ7.1 U15.1 U15.5 U15.9 U15.11 U15.13 U15.15 U16.1 U16.5 U16.9 U16.11 U16.13 U16.15 U17.4 U18.1 U18.3 U18.6 U18.PAD U19.2 U20.15 U21.15
GND3: C40.2 C41.2 C42.2 C44.2 C45.2 C46.2 C47.2 C48.2 C49.2 C50.2 C51.2 C52.2 JP7.6 JP7.9 JP7.14 JP7.20 JP7.25 JP8.GND1 JP8.SHIELD1 JP8.SHIELD2 JP8.SHIELD3 R41.1 S4.1 SJ10.1 U22.1 U22.5 U22.9 U22.11 U22.13 U22.15 U23.1 U23.5 U23.9 U23.11 U23.13 U23.15 U24.4 U25.1 U25.3 U25.6 U25.PAD U26.2 U27.15 U28.15
GP1: U8.48 U9.48 U13.1
GP2: U8.42 U9.42
GP3: U8.34 U9.34
GP4: U8.32 U9.32 U13.10
GP5: U8.30 U9.30 U13.9
GP6: U8.28 U9.28 U13.8
GP7: U8.26 U9.26 U13.7
GP8: U8.25 U9.25
GP9: U8.24 U9.24 U13.4
GP10: U15.48 U16.48 U20.1
GP11: U15.42 U16.42
GP12: U15.34 U16.34
GP12_PWM0: U2.35 U3.35 U6.2
GP12_PWM1: U8.35 U9.35 U13.2
GP12_PWM2: U15.35 U16.35 U20.2
GP12_PWM3: U22.35 U23.35 U27.2
GP13: U15.32 U16.32 U20.10
GP13_PWM1: U2.33 U3.33 U6.3
GP13_PWM2: U8.33 U9.33 U13.3
GP13_PWM3: U15.33 U16.33 U20.3
GP13_PWM4: U22.33 U23.33 U27.3
GP14: U2.48 U3.48 U6.1
GP15: U2.42 U3.42
GP16: U15.30 U16.30 U20.9
GP17: U15.28 U16.28 U20.8
GP18: U15.26 U16.26 U20.7
GP19: U15.25 U16.25
GP19_I2C_1_SCL: R4.1 U1.2 U2.41 U3.41
GP19_I2C_1_SCL1: R15.1 U8.41 U9.41 U10.2
GP19_I2C_1_SCL2: R26.1 U15.41 U16.41 U17.2
GP19_I2C_1_SCL3: R37.1 U22.41 U23.41 U24.2
GP20: U15.24 U16.24 U20.4
GP20_I2C_1_SDA: R5.1 U1.3 U2.43 U3.43
GP20_I2C_1_SDA1: R16.1 U8.43 U9.43 U10.3
GP20_I2C_1_SDA2: R27.1 U15.43 U16.43 U17.3
GP20_I2C_1_SDA3: R38.1 U22.43 U23.43 U24.3
GP21: U22.48 U23.48 U27.1
GP22: U22.42 U23.42
GP23: U22.34 U23.34
GP24: U22.32 U23.32 U27.10
GP25: U22.30 U23.30 U27.9
GP26: U22.28 U23.28 U27.8
GP27: U22.26 U23.26 U27.7
GP27_I2C_6_SCL: U2.45 U3.45
GP27_I2C_6_SCL1: U8.45 U9.45
GP27_I2C_6_SCL2: U15.45 U16.45
GP27_I2C_6_SCL3: U22.45 U23.45
GP28: U22.25 U23.25
GP28_I2C_6_SDA: U2.47 U3.47
GP28_I2C_6_SDA1: U8.47 U9.47
GP28_I2C_6_SDA2: U15.47 U16.47
GP28_I2C_6_SDA3: U22.47 U23.47
GP29: U22.24 U23.24 U27.4
GP40_I2S_2_CLK: U2.52 U3.52
GP40_I2S_2_CLK1: U8.52 U9.52
GP40_I2S_2_CLK2: U15.52 U16.52
GP40_I2S_2_CLK3: U22.52 U23.52
GP41_I2S_2_FS: U2.54 U3.54
GP41_I2S_2_FS1: U8.54 U9.54
GP41_I2S_2_FS2: U15.54 U16.54
GP41_I2S_2_FS3: U22.54 U23.54
GP42_I2S_2_RXD: U2.50 U3.50
GP42_I2S_2_RXD1: U8.50 U9.50
GP42_I2S_2_RXD2: U15.50 U16.50
GP42_I2S_2_RXD3: U22.50 U23.50
GP43_I2S_2_TXD: U2.56 U3.56
GP43_I2S_2_TXD1: U8.56 U9.56
GP43_I2S_2_TXD2: U15.56 U16.56
GP43_I2S_2_TXD3: U22.56 U23.56
GP44: U2.24 U3.24 U6.4
GP45: U2.26 U3.26 U6.7
GP46: U2.28 U3.28 U6.8
GP47: U2.30 U3.30 U6.9
GP48: U2.32 U3.32 U6.10
GP49: U2.34 U3.34
GP77_SD_0_CD#: U2.60 U3.60
GP77_SD_0_CD#1: U8.60 U9.60
GP77_SD_0_CD#2: U15.60 U16.60
GP77_SD_0_CD#3: U22.60 U23.60
GP78_SD_0_CLK: U2.58 U3.58
GP78_SD_0_CLK1: U8.58 U9.58
GP78_SD_0_CLK2: U15.58 U16.58
GP78_SD_0_CLK3: U22.58 U23.58
GP79_SD_0_CMD: U2.62 U3.62
GP79_SD_0_CMD1: U8.62 U9.62
GP79_SD_0_CMD2: U15.62 U16.62
GP79_SD_0_CMD3: U22.62 U23.62
GP80_SD_0_DAT0: U2.66 U3.66
GP80_SD_0_DAT1: U8.66 U9.66
GP80_SD_0_DAT2: U15.66 U16.66
GP80_SD_0_DAT3: U22.66 U23.66
GP81_SD_0_DAT1: U2.70 U3.70
GP81_SD_0_DAT2: U8.70 U9.70
GP81_SD_0_DAT3: U15.70 U16.70
GP81_SD_0_DAT4: U22.70 U23.70
GP82_SD_0_DAT1: U8.64 U9.64
GP82_SD_0_DAT2: U2.64 U3.64
GP82_SD_0_DAT3: U15.64 U16.64
GP82_SD_0_DAT4: U22.64 U23.64
GP83_SD_0_DAT1: U8.68 U9.68
GP83_SD_0_DAT2: U15.68 U16.68
GP83_SD_0_DAT3: U2.68 U3.68
GP83_SD_0_DAT4: U22.68 U23.68
GP84_SD_CLK_FB: U2.44 U3.44
GP84_SD_CLK_FB1: U8.44 U9.44
GP84_SD_CLK_FB2: U15.44 U16.44
GP84_SD_CLK_FB3: U22.44 U23.44
GP109_SPI_2_CLK: U2.55 U3.55 U7.3
GP109_SPI_2_CLK1: U8.55 U9.55 U14.3
GP109_SPI_2_CLK2: U15.55 U16.55 U21.3
GP109_SPI_2_CLK3: U22.55 U23.55 U28.3
GP110_SPI_2_FS0: U2.53 U3.53 U7.8
GP110_SPI_2_FS1: U8.53 U9.53 U14.8
GP110_SPI_2_FS2: U15.53 U16.53 U21.8
GP110_SPI_2_FS3: U22.53 U23.53 U28.8
GP111_SPI_2_FS1: U2.51 U3.51 U7.9
GP111_SPI_2_FS2: U8.51 U9.51 U14.9
GP111_SPI_2_FS3: U15.51 U16.51 U21.9
GP111_SPI_2_FS4: U22.51 U23.51 U28.9
GP114_SPI_2_RXD: U2.59 U3.59 U7.4
GP114_SPI_2_RXD1: U8.59 U9.59 U14.4
GP114_SPI_2_RXD2: U15.59 U16.59 U21.4
GP114_SPI_2_RXD3: U22.59 U23.59 U28.4
GP115_SPI_2_TXD: U2.57 U3.57 U7.7
GP115_SPI_2_TXD1: U8.57 U9.57 U14.7
GP115_SPI_2_TXD2: U15.57 U16.57 U21.7
GP115_SPI_2_TXD3: U22.57 U23.57 U28.7
GP128_UART_1_CTS: U2.65 U3.65
GP128_UART_1_CTS1: U8.65 U9.65
GP128_UART_1_CTS2: U15.65 U16.65
GP128_UART_1_CTS3: U22.65 U23.65
GP129_UART_1_RTS: U2.63 U3.63
GP129_UART_1_RTS1: U8.63 U9.63
GP129_UART_1_RTS2: U15.63 U16.63
GP129_UART_1_RTS3: U22.63 U23.63
GP130_UART_1_RX: U2.61 U3.61 U7.2
GP130_UART_1_RX1: U8.61 U9.61 U14.2
GP130_UART_1_RX2: U15.61 U16.61 U21.2
GP130_UART_1_RX3: U22.61 U23.61 U28.2
GP131_UART_1_TX: U2.46 U3.46 U7.1
GP131_UART_1_TX1: U8.46 U9.46 U14.1
GP131_UART_1_TX2: U15.46 U16.46 U21.1
GP131_UART_1_TX3: U22.46 U23.46 U28.1
GP134_UART_2_RX: U2.22 U3.22
GP134_UART_2_RX1: U8.22 U9.22
GP134_UART_2_RX2: U15.22 U16.22
GP134_UART_2_RX3: U22.22 U23.22
GP135_UART_2_TX: U2.27 U3.27
GP135_UART_2_TX1: U8.27 U9.27
GP135_UART_2_TX2: U15.27 U16.27
GP135_UART_2_TX3: U22.27 U23.27
GP165: U2.25 U3.25
GP182_PWM1: U8.37 U9.37
GP182_PWM2: U2.37 U3.37
GP182_PWM3: U15.37 U16.37
GP182_PWM4: U22.37 U23.37
GP183_PWM1: U8.39 U9.39
GP183_PWM2: U15.39 U16.39
GP183_PWM3: U2.39 U3.39
GP183_PWM4: U22.39 U23.39
HV_SCL: JP1.5 R2.1 U1.6
HV_SCL1: JP2.5 R13.1 U10.6
HV_SCL2: JP5.5 R24.1 U17.6
HV_SCL3: JP7.5 R35.1 U24.6
HV_SDA: JP1.3 R1.1 U1.5
HV_SDA1: JP2.3 R12.1 U10.5
HV_SDA2: JP5.3 R23.1 U17.5
HV_SDA3: JP7.3 R34.1 U24.5
MSIC_SLP_CLK: U2.7 U3.7
MSIC_SLP_CLK1: U8.7 U9.7
MSIC_SLP_CLK2: U15.7 U16.7
MSIC_SLP_CLK3: U22.7 U23.7
N$1: R3.1 U1.7 U1.8
N$2: F1.1 JP3.VBUS1
N$3: D1.C SJ1.2 TP1.P$1
N$4: R1.2 SJ2.3
N$5: R2.2 SJ2.1
N$6: R14.1 U10.7 U10.8
N$7: F2.1 JP4.VBUS1
N$8: D2.C R17.2
N$9: R17.1 SJ4.2
N$10: C17.2 R18.1 R19.2 U11.4
N$11: L2.P$1 U11.2
N$12: D3.C R6.2
N$13: R6.1 SJ3.2
N$14: R20.2 R21.2 S2.2
N$15: R9.2 R10.2 S1.2
N$16: Q1.1 R11.1
N$17: Q2.1 R22.1
N$18: C9.2 R7.1 R8.2 U4.4
N$19: L1.P$1 U4.2
N$20: D4.C SJ5.2 TP2.P$1
N$21: R12.2 SJ6.3
N$22: R13.2 SJ6.1
N$23: R25.1 U17.7 U17.8
N$24: F3.1 JP6.VBUS1
N$25: D5.C R28.2
N$26: R28.1 SJ7.2
N$27: C30.2 R29.1 R30.2 U18.4
N$28: L3.P$1 U18.2
N$29: R31.2 R32.2 S3.2
N$30: Q3.1 R33.1
N$31: D6.C SJ8.2 TP3.P$1
N$32: R23.2 SJ9.3
N$33: R24.2 SJ9.1
N$34: R36.1 U24.7 U24.8
N$35: F4.1 JP8.VBUS1
N$36: D7.C R39.2
N$37: R39.1 SJ10.2
N$38: C43.2 R40.1 R41.2 U25.4
N$39: L4.P$1 U25.2
N$40: R42.2 R43.2 S4.2
N$41: Q4.1 R44.1
N$42: D8.C SJ11.2 TP4.P$1
N$43: R34.2 SJ12.3
N$44: R35.2 SJ12.1
OSC_CLK_OUT: U2.67 U3.67
OSC_CLK_OUT1: U8.67 U9.67
OSC_CLK_OUT2: U15.67 U16.67
OSC_CLK_OUT3: U22.67 U23.67
PI_CE0: JP1.24 U7.13
PI_CE1: JP1.26 U7.12
PI_CE2: JP2.24 U14.13
PI_CE3: JP2.26 U14.12
PI_CE4: JP5.24 U21.13
PI_CE5: JP5.26 U21.12
PI_CE6: JP7.24 U28.13
PI_CE7: JP7.26 U28.12
PI_GP1: JP2.7 U13.20
PI_GP2: JP2.11 U13.19
PI_GP3: JP2.15 U13.17
PI_GP4: JP1.7 U6.20
PI_GP5: JP2.16 U13.14
PI_GP6: JP2.18 U13.13
PI_GP7: JP2.22 U13.12
PI_GP8: JP2.13 U13.11
PI_GP9: JP5.7 U20.20
PI_GP10: JP5.11 U20.19
PI_GP11: JP5.15 U20.17
PI_GP12: JP5.16 U20.14
PI_GP13: JP5.18 U20.13
PI_GP14: JP5.22 U20.12
PI_GP15: JP5.13 U20.11
PI_GP16: JP7.7 U27.20
PI_GP17: JP1.11 U6.19
PI_GP18: JP7.11 U27.19
PI_GP18#: JP1.12 U6.18
PI_GP18#1: JP2.12 U13.18
PI_GP18#2: JP5.12 U20.18
PI_GP18#3: JP7.12 U27.18
PI_GP19: JP7.15 U27.17
PI_GP20: JP7.16 U27.14
PI_GP21: JP7.18 U27.13
PI_GP22: JP1.15 U6.17
PI_GP23: JP1.16 U6.14
PI_GP24: JP1.18 U6.13
PI_GP25: JP1.22 U6.12
PI_GP26: JP7.22 U27.12
PI_GP27: JP1.13 U6.11
PI_GP28: JP7.13 U27.11
PI_MISO: JP1.21 U7.17
PI_MISO1: JP2.21 U14.17
PI_MISO2: JP5.21 U21.17
PI_MISO3: JP7.21 U28.17
PI_MOSI: JP1.19 U7.14
PI_MOSI1: JP2.19 U14.14
PI_MOSI2: JP5.19 U21.14
PI_MOSI3: JP7.19 U28.14
PI_RXI: JP1.10 U7.19
PI_RXI1: JP2.10 U14.19
PI_RXI2: JP5.10 U21.19
PI_RXI3: JP7.10 U28.19
PI_SCLK: JP1.23 U7.18
PI_SCLK1: JP2.23 U14.18
PI_SCLK2: JP5.23 U21.18
PI_SCLK3: JP7.23 U28.18
PI_TXO: JP1.8 U7.20
PI_TXO1: JP2.8 U14.20
PI_TXO2: JP5.8 U21.20
PI_TXO3: JP7.8 U28.20
PSW: U2.21 U3.21
PSW1: U8.21 U9.21
PSW2: U15.21 U16.21
PSW3: U22.21 U23.21
PWRBTN#: R10.1 U2.17 U3.17
PWRBTN#1: R21.1 U8.17 U9.17
PWRBTN#2: R32.1 U15.17 U16.17
PWRBTN#3: R43.1 U22.17 U23.17
RCVR_MODE: U2.31 U3.31
RCVR_MODE1: U8.31 U9.31
RCVR_MODE2: U15.31 U16.31
RCVR_MODE3: U22.31 U23.31
RESET_OUT#: U2.36 U3.36
RESET_OUT#1: U8.36 U9.36
RESET_OUT#2: U15.36 U16.36
RESET_OUT#3: U22.36 U23.36
USB_DN: U2.18 U3.18
USB_DN1: U8.18 U9.18
USB_DN2: U15.18 U16.18
USB_DN3: U22.18 U23.18
USB_DP: U2.16 U3.16
USB_DP1: U8.16 U9.16
USB_DP2: U15.16 U16.16
USB_DP3: U22.16 U23.16
USB_ID: U2.3 U3.3
USB_ID1: U8.3 U9.3
USB_ID2: U15.3 U16.3
USB_ID3: U22.3 U23.3
USB_VBUS: U2.20 U3.20
USB_VBUS1: U8.20 U9.20
USB_VBUS2: U15.20 U16.20
USB_VBUS3: U22.20 U23.20
V_BAT_BKUP: U2.23 U3.23
V_BAT_BKUP1: U8.23 U9.23
V_BAT_BKUP2: U15.23 U16.23
V_BAT_BKUP3: U22.23 U23.23
VSYS: C8.1 C9.1 D1.A D3.A L1.P$2 Q1.3 R7.2 R9.1 U2.2 U2.4 U2.6 U3.2 U3.4 U3.6 U5.1 U5.3
VSYS1: C16.1 C17.1 D2.A D4.A L2.P$2 Q2.3 R18.2 R20.1 U8.2 U8.4 U8.6 U9.2 U9.4 U9.6 U12.1 U12.3
VSYS2: C29.1 C30.1 D5.A D6.A L3.P$2 Q3.3 R29.2 R31.1 U15.2 U15.4 U15.6 U16.2 U16.4 U16.6 U19.1 U19.3
VSYS3: C42.1 C43.1 D7.A D8.A L4.P$2 Q4.3 R40.2 R42.1 U22.2 U22.4 U22.6 U23.2 U23.4 U23.6 U26.1 U26.3

## Tracks (layer width: path | path; a pad name or v marks a point on that pad's centre or on a via)
1.8V  (via drill 0.33)
  Top 0.152: U3.12 31.9,77.37 31.85,77.32 31.14,77.32 v30.48,77.98 | 19.3,78.74 19.3,74.93 19.68,74.55 19.68,73.91 19.56,73.79 19.56,73.08 | 20.19,78.61 20.07,78.74 | C7.1 27.94,62.1 27.69,62.36 v27.05,62.36 | v19.3,68.58 19.3,69.34 19.56,69.6 19.56,73.08 | U1.1 19.56,73.07 19.56,73.08 | U6.5 18.49,87.68 v18.16,88.01 18.09,87.94 U6.6 | U7.6 27,62.3 v27.05,62.36 | U7.5 26.6,61.9 v27.05,62.36
  Top 0.254: C5.1 18.71,88.94 18.16,88.39 v18.16,88.01 | 18.29,78.74 16.76,78.74 16.38,78.36 R5.2 | 18.29,78.74 19.3,78.74 20.07,78.74 20.19,78.74 22.86,81.41 v22.86,84.96 | C1.1 20.19,78.61 | R4.2 18.29,78.74
  Bottom 0.152: U3.12 31.9,77.37 31.85,77.32 31.14,77.32 v30.48,77.98 | v19.3,68.58 20.07,68.58 22.61,66.04 22.61,65.66 25.91,62.36 v27.05,62.36
  Bottom 0.254: v30.48,77.98 30.48,80.52 28.32,82.68 25.78,82.68 23.5,84.96 v22.86,84.96 22.86,85.6 21.34,87.12 19.05,87.12 v18.16,88.01
1.8V1  (via drill 0.33)
  Top 0.152: U9.12 65.43,77.37 65.38,77.32 64.67,77.32 v64.01,77.98 | 52.83,78.74 52.83,74.93 53.21,74.55 53.21,73.91 53.09,73.79 53.09,73.08 | 53.72,78.61 53.59,78.74 | C23.1 61.47,62.1 61.21,62.36 v60.58,62.36 | v52.83,68.58 52.83,69.34 53.09,69.6 53.09,73.08 | U10.1 53.08,73.07 53.09,73.08 | U13.5 52.02,87.68 v51.69,88.01 51.62,87.94 U13.6 | U14.6 60.52,62.3 v60.58,62.36 | U14.5 60.12,61.9 v60.58,62.36
  Top 0.254: C21.1 52.24,88.94 51.69,88.39 v51.69,88.01 | 51.82,78.74 50.29,78.74 49.91,78.36 R16.2 | 51.82,78.74 52.83,78.74 53.59,78.74 53.72,78.74 56.39,81.41 v56.39,84.96 | C15.1 53.72,78.61 | R15.2 51.82,78.74
  Bottom 0.152: U9.12 65.43,77.37 65.38,77.32 64.67,77.32 v64.01,77.98 | v52.83,68.58 53.59,68.58 56.13,66.04 56.13,65.66 59.44,62.36 v60.58,62.36
  Bottom 0.254: v64.01,77.98 64.01,80.52 61.85,82.68 59.31,82.68 57.02,84.96 v56.39,84.96 56.39,85.6 54.86,87.12 52.58,87.12 v51.69,88.01
1.8V2  (via drill 0.33)
  Top 0.152: U16.12 98.96,77.37 98.91,77.32 98.2,77.32 v97.54,77.98 | 86.36,78.74 86.36,74.93 86.74,74.55 86.74,73.91 86.61,73.79 86.61,73.08 | 87.25,78.61 87.12,78.74 | C36.1 95,62.1 94.74,62.36 v94.11,62.36 | v86.36,68.58 86.36,69.34 86.61,69.6 86.61,73.08 | U17.1 86.61,73.07 86.61,73.08 | U20.5 85.54,87.68 v85.22,88.01 85.14,87.94 U20.6 | U21.6 94.05,62.3 v94.11,62.36 | U21.5 93.65,61.9 v94.11,62.36
  Top 0.254: C34.1 85.76,88.94 85.22,88.39 v85.22,88.01 | 85.34,78.74 83.82,78.74 83.44,78.36 R27.2 | 85.34,78.74 86.36,78.74 87.12,78.74 87.25,78.74 89.92,81.41 v89.92,84.96 | C28.1 87.25,78.61 | R26.2 85.34,78.74
  Bottom 0.152: U16.12 98.96,77.37 98.91,77.32 98.2,77.32 v97.54,77.98 | v86.36,68.58 87.12,68.58 89.66,66.04 89.66,65.66 92.96,62.36 v94.11,62.36
  Bottom 0.254: v97.54,77.98 97.54,80.52 95.38,82.68 92.84,82.68 90.55,84.96 v89.92,84.96 89.92,85.6 88.39,87.12 86.11,87.12 v85.22,88.01
1.8V3  (via drill 0.33)
  Top 0.152: U23.12 132.49,77.37 132.44,77.32 131.72,77.32 v131.06,77.98 | 119.89,78.74 119.89,74.93 120.27,74.55 120.27,73.91 120.14,73.79 120.14,73.08 | 120.78,78.61 120.65,78.74 | C49.1 128.52,62.1 128.27,62.36 v127.64,62.36 | v119.89,68.58 119.89,69.34 120.14,69.6 120.14,73.08 | U24.1 120.14,73.07 120.14,73.08 | U27.5 119.07,87.68 v118.75,88.01 118.67,87.94 U27.6 | U28.6 127.58,62.3 v127.64,62.36 | U28.5 127.18,61.9 v127.64,62.36
  Top 0.254: C47.1 119.29,88.94 118.75,88.39 v118.75,88.01 | 118.87,78.74 117.35,78.74 116.97,78.36 R38.2 | 118.87,78.74 119.89,78.74 120.65,78.74 120.78,78.74 123.44,81.41 v123.44,84.96 | C41.1 120.78,78.61 | R37.2 118.87,78.74
  Bottom 0.152: U23.12 132.49,77.37 132.44,77.32 131.72,77.32 v131.06,77.98 | v119.89,68.58 120.65,68.58 123.19,66.04 123.19,65.66 126.49,62.36 v127.64,62.36
  Bottom 0.254: v131.06,77.98 131.06,80.52 128.91,82.68 126.36,82.68 124.08,84.96 v123.44,84.96 123.44,85.6 121.92,87.12 119.63,87.12 v118.75,88.01
3.3V  (via drill 0.33)
  Top 0.198: U3.8 31.68,78.17 v31.48,77.97 31.68,77.77 U3.10
  Bottom 0.152: U3.8
  Bottom 0.198: U3.8 31.68,78.17 v31.48,77.97 31.68,77.77 U3.10
3.3V1  (via drill 0.33)
  Top 0.198: U9.8 65.21,78.17 v65.01,77.97 65.21,77.77 U9.10
  Bottom 0.152: U9.8
  Bottom 0.198: U9.8 65.21,78.17 v65.01,77.97 65.21,77.77 U9.10
3.3V2  (via drill 0.33)
  Top 0.198: U16.8 98.73,78.17 v98.53,77.97 98.73,77.77 U16.10
  Bottom 0.152: U16.8
  Bottom 0.198: U16.8 98.73,78.17 v98.53,77.97 98.73,77.77 U16.10
3.3V3  (via drill 0.33)
  Top 0.198: U23.8 132.26,78.17 v132.06,77.97 132.26,77.77 U23.10
  Bottom 0.152: U23.8
  Bottom 0.198: U23.8 132.26,78.17 v132.06,77.97 132.26,77.77 U23.10
3.3V_LOCAL  (via drill 0.33)
  Top 0.152: C6.1 19.05,81.79 19.3,82.04 19.3,82.3 v18.67,82.93 18.49,83.11 U6.16 | U7.16 20.21,61.9 C11.1
  Top 0.254: R3.2 17.31,64.43 17.4,64.52 | JP1.17 22.1,29.72 22.1,47.5 JP1.1 | 17.4,64.52 17.4,65.91 17.61,66.13 C2.1 19.39,66.13 20.07,66.8 20.07,70.1 21.36,71.4 21.36,78.64 v22.23,79.5 23.52,80.8 25.93,80.8 26.12,80.99 C4.1 26.17,81.84 C3.1 26.22,84.38 U5.5 | 17.4,64.52 17.4,61.85 | 17.4,61.85 18.16,61.09 | 18.16,61.09 19.43,59.82 21.21,59.82 v21.59,59.44 21.08,58.93 C13.1 | C11.1 18.96,61.89 18.16,61.09 | SJ2.2 15.11,61.21 15.37,60.96 16.51,60.96 17.4,61.85
  Bottom 0.152: v18.67,82.93 18.8,82.93 v22.23,79.5
  Bottom 0.254: v21.59,59.44 21.59,58.8 22.61,57.78 22.61,49.53 JP1.1
3.3V_LOCAL1  (via drill 0.33)
  Top 0.152: C22.1 52.58,81.79 52.83,82.04 52.83,82.3 v52.2,82.93 52.02,83.11 U13.16 | U14.16 53.74,61.9 C24.1
  Top 0.254: R14.2 50.84,64.43 50.93,64.52 | JP2.17 55.63,29.72 55.63,47.5 JP2.1 | 50.93,64.52 50.93,65.91 51.14,66.13 C14.1 52.92,66.13 53.59,66.8 53.59,70.1 54.89,71.4 54.89,78.64 v55.75,79.5 57.05,80.8 59.46,80.8 59.65,80.99 C20.1 59.7,81.84 C19.1 59.75,84.38 U12.5 | 50.93,64.52 50.93,61.85 | 50.93,61.85 51.69,61.09 | 51.69,61.09 52.96,59.82 54.74,59.82 v55.12,59.44 54.61,58.93 C26.1 | C24.1 52.49,61.89 51.69,61.09 | SJ6.2 48.64,61.21 48.9,60.96 50.04,60.96 50.93,61.85
  Bottom 0.152: v52.2,82.93 52.32,82.93 v55.75,79.5
  Bottom 0.254: v55.12,59.44 55.12,58.8 56.13,57.78 56.13,49.53 JP2.1
3.3V_LOCAL2  (via drill 0.33)
  Top 0.152: C35.1 86.11,81.79 86.36,82.04 86.36,82.3 v85.72,82.93 85.54,83.11 U20.16 | U21.16 87.26,61.9 C37.1
  Top 0.254: R25.2 84.37,64.43 84.45,64.52 | JP5.17 89.15,29.72 89.15,47.5 JP5.1 | 84.45,64.52 84.45,65.91 84.67,66.13 C27.1 86.45,66.13 87.12,66.8 87.12,70.1 88.42,71.4 88.42,78.64 v89.28,79.5 90.58,80.8 92.99,80.8 93.18,80.99 C33.1 93.23,81.84 C32.1 93.28,84.38 U19.5 | 84.45,64.52 84.45,61.85 | 84.45,61.85 85.22,61.09 | 85.22,61.09 86.49,59.82 88.27,59.82 v88.65,59.44 88.14,58.93 C39.1 | C37.1 86.02,61.89 85.22,61.09 | SJ9.2 82.17,61.21 82.42,60.96 83.57,60.96 84.45,61.85
  Bottom 0.152: v85.72,82.93 85.85,82.93 v89.28,79.5
  Bottom 0.254: v88.65,59.44 88.65,58.8 89.66,57.78 89.66,49.53 JP5.1
3.3V_LOCAL3  (via drill 0.33)
  Top 0.152: C48.1 119.63,81.79 119.89,82.04 119.89,82.3 v119.25,82.93 119.07,83.11 U27.16 | U28.16 120.79,61.9 C50.1
  Top 0.254: R36.2 117.89,64.43 117.98,64.52 | JP7.17 122.68,29.72 122.68,47.5 JP7.1 | 117.98,64.52 117.98,65.91 118.2,66.13 C40.1 119.98,66.13 120.65,66.8 120.65,70.1 121.94,71.4 121.94,78.64 v122.81,79.5 124.1,80.8 126.52,80.8 126.71,80.99 C46.1 126.76,81.84 C45.1 126.81,84.38 U26.5 | 117.98,64.52 117.98,61.85 | 117.98,61.85 118.75,61.09 | 118.75,61.09 120.02,59.82 121.79,59.82 v122.17,59.44 121.67,58.93 C52.1 | C50.1 119.55,61.89 118.75,61.09 | SJ12.2 115.7,61.21 115.95,60.96 117.09,60.96 117.98,61.85
  Bottom 0.152: v119.25,82.93 119.38,82.93 v122.81,79.5
  Bottom 0.254: v122.17,59.44 122.17,58.8 123.19,57.78 123.19,49.53 JP7.1
5V  (via drill 0.33, 0.51)
  Top 0.152: C10.1 22.26,67.09 v20.32,65.15
  Top 0.254: JP1.4 JP1.2 25.91,56.9 25.65,57.15 25.65,58.04 v26.92,59.31 27.3,58.93 C12.1 | U4.5 22.11,69.48 v21.84,69.22 22.99,69.22 23.42,69.65 | U4.8 23.61,69.84 23.42,69.65 | 23.42,69.65 23.11,69.65 U4.7
  Top 0.381: F1.2 v21.84,93.22 21.34,93.73 20.32,93.73 19.68,94.36 19.68,96.95 19.02,97.61 17.04,97.61 16.38,96.95 SJ1.1 | R11.2 11.9,81.19 v11.86,81.15
  Bottom 0.152: v20.32,65.15 22.1,63.37 22.35,63.37 22.73,62.99 22.73,61.34 24,60.07 25.15,60.07 25.91,59.31 v26.92,59.31
  Bottom 0.381: v21.84,69.22 21.84,71.63 21.31,72.16 21.31,74.65 23.11,76.45 23.11,79.88 14.99,88.01 14.99,88.14 | 14.99,88.14 14.99,88.9 16,89.92 16,93.22 16.51,93.73 21.34,93.73 v21.84,93.22 | v11.86,81.15 11.86,85.01 14.99,88.14
  pour Top (isolate 0.305): 22.86,67.31 21.34,67.31 21.34,69.85 21.97,70.48 23.75,70.48 23.75,69.98 22.86,69.09
5V1  (via drill 0.33, 0.51)
  Top 0.152: C18.1 55.79,67.09 v53.85,65.15
  Top 0.254: JP2.4 JP2.2 59.44,56.9 59.18,57.15 59.18,58.04 v60.45,59.31 60.83,58.93 C25.1 | U11.5 55.64,69.48 v55.37,69.22 56.52,69.22 56.95,69.65 | U11.8 57.14,69.84 56.95,69.65 | 56.95,69.65 56.64,69.65 U11.7
  Top 0.381: F2.2 v55.37,93.22 54.86,93.73 53.85,93.73 53.21,94.36 53.21,96.95 52.55,97.61 50.57,97.61 49.91,96.95 SJ5.1 | R22.2 45.43,81.19 v45.39,81.15
  Bottom 0.152: v53.85,65.15 55.63,63.37 55.88,63.37 56.26,62.99 56.26,61.34 57.53,60.07 58.67,60.07 59.44,59.31 v60.45,59.31
  Bottom 0.381: v55.37,69.22 55.37,71.63 54.84,72.16 54.84,74.65 56.64,76.45 56.64,79.88 48.51,88.01 48.51,88.14 | 48.51,88.14 48.51,88.9 49.53,89.92 49.53,93.22 50.04,93.73 54.86,93.73 v55.37,93.22 | v45.39,81.15 45.39,85.01 48.51,88.14
  pour Top (isolate 0.305): 56.39,67.31 54.86,67.31 54.86,69.85 55.5,70.48 57.28,70.48 57.28,69.98 56.39,69.09
5V2  (via drill 0.33, 0.51)
  Top 0.152: C31.1 89.32,67.09 v87.38,65.15
  Top 0.254: JP5.4 JP5.2 92.96,56.9 92.71,57.15 92.71,58.04 v93.98,59.31 94.36,58.93 C38.1 | U18.5 89.17,69.48 v88.9,69.22 90.04,69.22 90.47,69.65 | U18.8 90.67,69.84 90.47,69.65 | 90.47,69.65 90.17,69.65 U18.7
  Top 0.381: F3.2 v88.9,93.22 88.39,93.73 87.38,93.73 86.74,94.36 86.74,96.95 86.08,97.61 84.1,97.61 83.44,96.95 SJ8.1 | R33.2 78.96,81.19 v78.92,81.15
  Bottom 0.152: v87.38,65.15 89.15,63.37 89.41,63.37 89.79,62.99 89.79,61.34 91.06,60.07 92.2,60.07 92.96,59.31 v93.98,59.31
  Bottom 0.381: v88.9,69.22 88.9,71.63 88.37,72.16 88.37,74.65 90.17,76.45 90.17,79.88 82.04,88.01 82.04,88.14 | 82.04,88.14 82.04,88.9 83.06,89.92 83.06,93.22 83.57,93.73 88.39,93.73 v88.9,93.22 | v78.92,81.15 78.92,85.01 82.04,88.14
  pour Top (isolate 0.305): 89.92,67.31 88.39,67.31 88.39,69.85 89.03,70.48 90.81,70.48 90.81,69.98 89.92,69.09
5V3  (via drill 0.33, 0.51)
  Top 0.152: C44.1 122.85,67.09 v120.9,65.15
  Top 0.254: JP7.4 JP7.2 126.49,56.9 126.24,57.15 126.24,58.04 v127.51,59.31 127.89,58.93 C51.1 | U25.5 122.69,69.48 v122.43,69.22 123.57,69.22 124,69.65 | U25.8 124.19,69.84 124,69.65 | 124,69.65 123.7,69.65 123.69,69.65 U25.7
  Top 0.381: F4.2 v122.43,93.22 121.92,93.73 120.9,93.73 120.27,94.36 120.27,96.95 119.61,97.61 117.63,97.61 116.97,96.95 SJ11.1 | R44.2 112.48,81.19 v112.45,81.15
  Bottom 0.152: v120.9,65.15 122.68,63.37 122.94,63.37 123.32,62.99 123.32,61.34 124.59,60.07 125.73,60.07 126.49,59.31 v127.51,59.31
  Bottom 0.381: v122.43,69.22 122.43,71.63 121.89,72.16 121.89,74.65 123.7,76.45 123.7,79.88 115.57,88.01 115.57,88.14 | 115.57,88.14 115.57,88.9 116.59,89.92 116.59,93.22 117.09,93.73 121.92,93.73 v122.43,93.22 | v112.45,81.15 112.45,85.01 115.57,88.14
  pour Top (isolate 0.305): 123.44,67.31 121.92,67.31 121.92,69.85 122.56,70.48 124.33,70.48 124.33,69.98 123.44,69.09
DCIN  (via drill 0.33)
  Top 0.152: U2.14 30.55,76.97 v29.46,78.05
  Top 0.254: v16.76,92.08 16,92.84 12.32,92.84 11.68,92.2 11.68,89.66 13.19,88.15 Q1.2
  Bottom 0.152: v29.46,78.05 30.55,76.97 U2.14
  Bottom 0.254: v29.46,78.05 29.03,78.49 25.91,78.49 24.89,79.5 24.89,80.26 17.4,87.76 17.4,88.52 17.78,88.9 17.78,91.06 v16.76,92.08
DCIN1  (via drill 0.33)
  Top 0.152: U8.14 64.08,76.97 v62.99,78.05
  Top 0.254: v50.29,92.08 49.53,92.84 45.85,92.84 45.21,92.2 45.21,89.66 46.72,88.15 Q2.2
  Bottom 0.152: v62.99,78.05 64.08,76.97 U8.14
  Bottom 0.254: v62.99,78.05 62.56,78.49 59.44,78.49 58.42,79.5 58.42,80.26 50.93,87.76 50.93,88.52 51.31,88.9 51.31,91.06 v50.29,92.08
DCIN2  (via drill 0.33)
  Top 0.152: U15.14 97.61,76.97 v96.52,78.05
  Top 0.254: v83.82,92.08 83.06,92.84 79.38,92.84 78.74,92.2 78.74,89.66 80.25,88.15 Q3.2
  Bottom 0.152: v96.52,78.05 97.61,76.97 U15.14
  Bottom 0.254: v96.52,78.05 96.09,78.49 92.96,78.49 91.95,79.5 91.95,80.26 84.45,87.76 84.45,88.52 84.84,88.9 84.84,91.06 v83.82,92.08
DCIN3  (via drill 0.33)
  Top 0.152: U22.14 131.13,76.97 v130.05,78.05
  Top 0.254: v117.35,92.08 116.59,92.84 112.9,92.84 112.27,92.2 112.27,89.66 113.78,88.15 Q4.2
  Bottom 0.152: v130.05,78.05 131.13,76.97 U22.14
  Bottom 0.254: v130.05,78.05 129.62,78.49 126.49,78.49 125.48,79.5 125.48,80.26 117.98,87.76 117.98,88.52 118.36,88.9 118.36,91.06 v117.35,92.08
FAULT  (via drill 0.33)
  Top 0.152: U3.19 36.14,75.77 36.32,75.95 37.13,75.95 37.44,76.25 37.95,76.25 v38.61,76.91
  Bottom 0.152: v38.61,76.91 37.95,76.25 37.44,76.25 37.13,75.95 36.32,75.95 36.14,75.77 U3.19
FAULT1  (via drill 0.33)
  Top 0.152: U9.19 69.67,75.77 69.85,75.95 70.66,75.95 70.97,76.25 71.48,76.25 v72.14,76.91
  Bottom 0.152: v72.14,76.91 71.48,76.25 70.97,76.25 70.66,75.95 69.85,75.95 69.67,75.77 U9.19
FAULT2  (via drill 0.33)
  Top 0.152: U16.19 103.2,75.77 103.38,75.95 104.19,75.95 104.5,76.25 105,76.25 v105.66,76.91
  Bottom 0.152: v105.66,76.91 105,76.25 104.5,76.25 104.19,75.95 103.38,75.95 103.2,75.77 U16.19
FAULT3  (via drill 0.33)
  Top 0.152: U23.19 136.73,75.77 136.91,75.95 137.72,75.95 138.02,76.25 138.53,76.25 v139.19,76.91
  Bottom 0.152: v139.19,76.91 138.53,76.25 138.02,76.25 137.72,75.95 136.91,75.95 136.73,75.77 U23.19
FW_RCVR  (via drill 0.33)
  Top 0.152: v35.89,64.69 36.3,65.1 36.3,65.63 36.16,65.77 U3.69
  Bottom 0.152: U3.69 36.16,65.77 36.3,65.63 36.3,65.1 v35.89,64.69
FW_RCVR1  (via drill 0.33)
  Top 0.152: v69.42,64.69 69.83,65.1 69.83,65.63 69.69,65.77 U9.69
  Bottom 0.152: U9.69 69.69,65.77 69.83,65.63 69.83,65.1 v69.42,64.69
FW_RCVR2  (via drill 0.33)
  Top 0.152: v102.95,64.69 103.35,65.1 103.35,65.63 103.22,65.77 U16.69
  Bottom 0.152: U16.69 103.22,65.77 103.35,65.63 103.35,65.1 v102.95,64.69
FW_RCVR3  (via drill 0.33)
  Top 0.152: v136.47,64.69 136.88,65.1 136.88,65.63 136.75,65.77 U23.69
  Bottom 0.152: U23.69 136.75,65.77 136.88,65.63 136.88,65.1 v136.47,64.69
GND  (via drill 0.33)
  Top 0.152: U3.15 36.18,76.57 v36.52,76.91
  Top 0.254: U4.6 22.61,70.87 U4.PAD 22.61,71.37 U4.3
  Bottom 0.152: U3.15 36.18,76.57 v36.52,76.91
  other vias: 37.64,78.56 18.41,62.61 25.27,90.04 20.95,98.81 28.32,98.81 27.79,64.9 25.53,66.55 32.13,57.45 34.21,58.09 16.64,74.68 18.29,71.63 20.32,71.5 20.45,74.55 23.88,72.9 22.23,78.23 22.23,76.83 24.26,76.96 15.75,80.26 25.83,80.09 24.26,83.06 30.35,99.57 30.35,97.03 30.35,94.49 30.35,91.95 30.35,89.41 30.35,86.87 30.35,84.33 37.97,81.92 35.43,81.92 32.89,81.92 36.45,80.29 18.92,99.57 16.38,99.57 13.84,99.57 10.67,64.01 15.24,58.17 23.62,54.18 23.37,52.83 25.15,51.31 39.12,63.88 10.29,89.41 10.29,86.87 10.29,84.33 10.29,81.79 25.27,87.5 10.29,78.23 10.29,71.63 29.11,80.87
  pour Bottom (isolate 0.152, rank 6): 39.88,99.06 39.88,58.17 arc-90 38.1,56.39 32.26,56.39 29.72,53.85 29.72,13.21 19.56,13.21 19.56,53.85 17.02,56.39 11.18,56.39 arc-90 9.4,58.17 9.4,99.06 arc-90 11.18,100.84 38.1,100.84 arc-90
  pour Top (isolate 0.051, rank 6): 39.88,58.12 arc-90 38.15,56.39 32.26,56.39 29.72,53.85 29.72,13.21 19.56,13.21 19.56,53.85 17.02,56.39 11.18,56.39 arc-90 9.4,58.17 9.4,99.06 arc-90 11.18,100.84 38.1,100.84 arc-90 39.88,99.06
GND1  (via drill 0.33)
  Top 0.152: U9.15 69.71,76.57 v70.05,76.91
  Top 0.254: U11.6 56.14,70.87 U11.PAD 56.14,71.37 U11.3
  Bottom 0.152: U9.15 69.71,76.57 v70.05,76.91
  other vias: 71.17,78.56 51.94,62.61 58.8,90.04 54.48,98.81 61.85,98.81 61.32,64.9 59.05,66.55 65.66,57.45 67.74,58.09 50.16,74.68 51.82,71.63 53.85,71.5 53.98,74.55 57.4,72.9 55.75,78.23 55.75,76.83 57.78,76.96 49.28,80.26 59.36,80.09 57.78,83.06 63.88,99.57 63.88,97.03 63.88,94.49 63.88,91.95 63.88,89.41 63.88,86.87 63.88,84.33 71.5,81.92 68.96,81.92 66.42,81.92 69.98,80.29 52.45,99.57 49.91,99.57 47.37,99.57 44.2,64.01 48.77,58.17 57.15,54.18 56.9,52.83 58.67,51.31 72.64,63.88 43.81,89.41 43.81,86.87 43.81,84.33 43.81,81.79 58.8,87.5 43.81,78.23 43.81,71.63 62.64,80.87
  pour Bottom (isolate 0.152, rank 6): 73.41,99.06 73.41,58.17 arc-90 71.63,56.39 65.79,56.39 63.25,53.85 63.25,13.21 53.09,13.21 53.09,53.85 50.55,56.39 44.7,56.39 arc-90 42.93,58.17 42.93,99.06 arc-90 44.7,100.84 71.63,100.84 arc-90
  pour Top (isolate 0.051, rank 6): 73.41,58.12 arc-90 71.68,56.39 65.79,56.39 63.25,53.85 63.25,13.21 53.09,13.21 53.09,53.85 50.55,56.39 44.7,56.39 arc-90 42.93,58.17 42.93,99.06 arc-90 44.7,100.84 71.63,100.84 arc-90 73.41,99.06
GND2  (via drill 0.33)
  Top 0.152: U16.15 103.24,76.57 v103.58,76.91
  Top 0.254: U18.6 89.67,70.87 U18.PAD 89.67,71.37 U18.3
  Bottom 0.152: U16.15 103.24,76.57 v103.58,76.91
  other vias: 104.7,78.56 85.47,62.61 92.33,90.04 88.01,98.81 95.38,98.81 94.84,64.9 92.58,66.55 99.19,57.45 101.27,58.09 83.69,74.68 85.34,71.63 87.38,71.5 87.5,74.55 90.93,72.9 89.28,78.23 89.28,76.83 91.31,76.96 82.8,80.26 92.89,80.09 91.31,83.06 97.41,99.57 97.41,97.03 97.41,94.49 97.41,91.95 97.41,89.41 97.41,86.87 97.41,84.33 105.03,81.92 102.49,81.92 99.95,81.92 103.5,80.29 85.98,99.57 83.44,99.57 80.9,99.57 77.72,64.01 82.3,58.17 90.68,54.18 90.42,52.83 92.2,51.31 106.17,63.88 77.34,89.41 77.34,86.87 77.34,84.33 77.34,81.79 92.33,87.5 77.34,78.23 77.34,71.63 96.16,80.87
  pour Bottom (isolate 0.152, rank 6): 106.93,99.06 106.93,58.17 arc-90 105.16,56.39 99.31,56.39 96.77,53.85 96.77,13.21 86.61,13.21 86.61,53.85 84.07,56.39 78.23,56.39 arc-90 76.45,58.17 76.45,99.06 arc-90 78.23,100.84 105.16,100.84 arc-90
  pour Top (isolate 0.051, rank 6): 106.93,58.12 arc-90 105.21,56.39 99.31,56.39 96.77,53.85 96.77,13.21 86.61,13.21 86.61,53.85 84.07,56.39 78.23,56.39 arc-90 76.45,58.17 76.45,99.06 arc-90 78.23,100.84 105.16,100.84 arc-90 106.93,99.06
GND3  (via drill 0.33)
  Top 0.152: U23.15 136.77,76.57 v137.11,76.91
  Top 0.254: U25.6 123.19,70.87 U25.PAD 123.19,71.37 U25.3
  Bottom 0.152: U23.15 136.77,76.57 v137.11,76.91
  other vias: 138.23,78.56 119,62.61 125.86,90.04 121.54,98.81 128.91,98.81 128.37,64.9 126.11,66.55 132.72,57.45 134.8,58.09 117.22,74.68 118.87,71.63 120.9,71.5 121.03,74.55 124.46,72.9 122.81,78.23 122.81,76.83 124.84,76.96 116.33,80.26 126.42,80.09 124.84,83.06 130.94,99.57 130.94,97.03 130.94,94.49 130.94,91.95 130.94,89.41 130.94,86.87 130.94,84.33 138.56,81.92 136.02,81.92 133.48,81.92 137.03,80.29 119.51,99.57 116.97,99.57 114.43,99.57 111.25,64.01 115.82,58.17 124.21,54.18 123.95,52.83 125.73,51.31 139.7,63.88 110.87,89.41 110.87,86.87 110.87,84.33 110.87,81.79 125.86,87.5 110.87,78.23 110.87,71.63 129.69,80.87
  pour Bottom (isolate 0.152, rank 6): 140.46,99.06 140.46,58.17 arc-90 138.68,56.39 132.84,56.39 130.3,53.85 130.3,13.21 120.14,13.21 120.14,53.85 117.6,56.39 111.76,56.39 arc-90 109.98,58.17 109.98,99.06 arc-90 111.76,100.84 138.68,100.84 arc-90
  pour Top (isolate 0.051, rank 6): 140.46,58.12 arc-90 138.73,56.39 132.84,56.39 130.3,53.85 130.3,13.21 120.14,13.21 120.14,53.85 117.6,56.39 111.76,56.39 arc-90 109.98,58.17 109.98,99.06 arc-90 111.76,100.84 138.68,100.84 arc-90 140.46,99.06
GP1  (via drill 0.33)
  Top 0.152: U9.48 67.55,70.17 68.02,70.64 68.02,80.31 67.18,81.15 65.41,81.15 63.12,83.44 63.12,90.17 v62.23,91.06 | U9.48 | v56.52,89.66 56.52,88.77 54.94,87.2 53.72,87.2 53.62,87.09 U13.1 | U9.48 v64.2,70.17
  Bottom 0.152: v56.52,89.66 57.91,91.06 v62.23,91.06 | U9.48 v64.2,70.17
GP2  (via drill 0.33)
  Top 0.152: U9.42 65.28,71.37 v65.1,71.55
  Bottom 0.152: v65.1,71.55 65.28,71.37 U9.42
GP3  (via drill 0.33)
  Top 0.152: U9.34 65.14,72.97 64.62,72.44 64.06,72.44 63.48,73.03 62.87,73.03 v62.59,73.3
  Bottom 0.152: v62.59,73.3 62.87,73.03 63.48,73.03 64.06,72.44 64.62,72.44 65.14,72.97 U9.34
GP4  (via drill 0.33)
  Top 0.152: v64.34,73.1 64.61,73.37 U9.32 67.3,73.37 67.67,73.74 67.67,80.16 67.06,80.77 65.28,80.77 62.74,83.31 62.74,89.53 60.45,91.82 56.13,91.82 55.88,92.08 51.31,92.08 48.26,89.03 48.26,88.29 49.15,87.4 49.81,87.4 50.02,87.19 U13.10
  Bottom 0.152: U9.32 64.61,73.37 v64.34,73.1
GP5  (via drill 0.33)
  Top 0.152: v63.52,73.69 63.6,73.76 65.35,73.76 65.36,73.77 U9.30 67.09,73.77 67.31,73.99 67.31,79.88 66.8,80.39 65.15,80.39 62.36,83.19 62.36,89.41 60.33,91.44 55.88,91.44 55.63,91.69 51.44,91.69 48.64,88.9 48.64,88.37 49.28,87.73 49.96,87.73 50.42,87.28 U13.9
  Bottom 0.152: v63.52,73.69 63.6,73.76 65.35,73.76 65.36,73.77 U9.30
GP6  (via drill 0.33)
  Top 0.152: U9.28 65.33,74.17 65.23,74.07 64.08,74.07 63.78,74.37 62.79,74.37 v62.74,74.32 | U13.8 50.82,87.33 v49.76,88.39